# Allegro board H3_CORE_EVM.brd
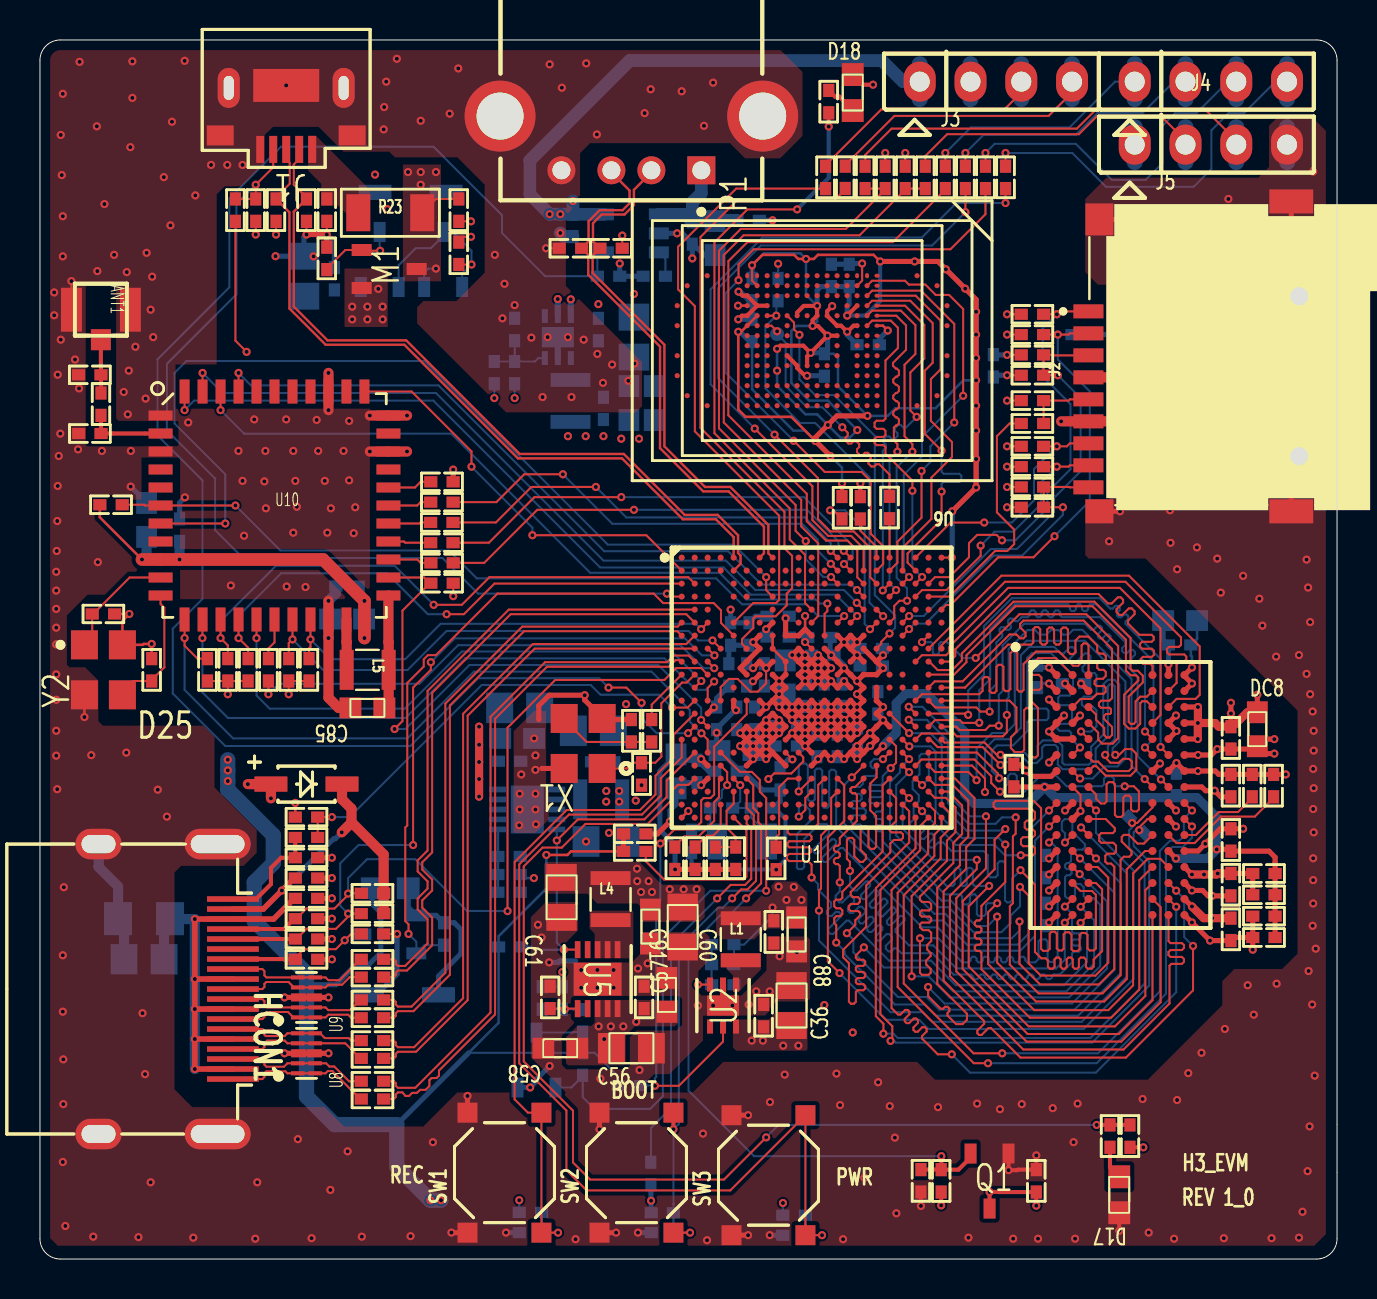
[diagram p0: board, top side]
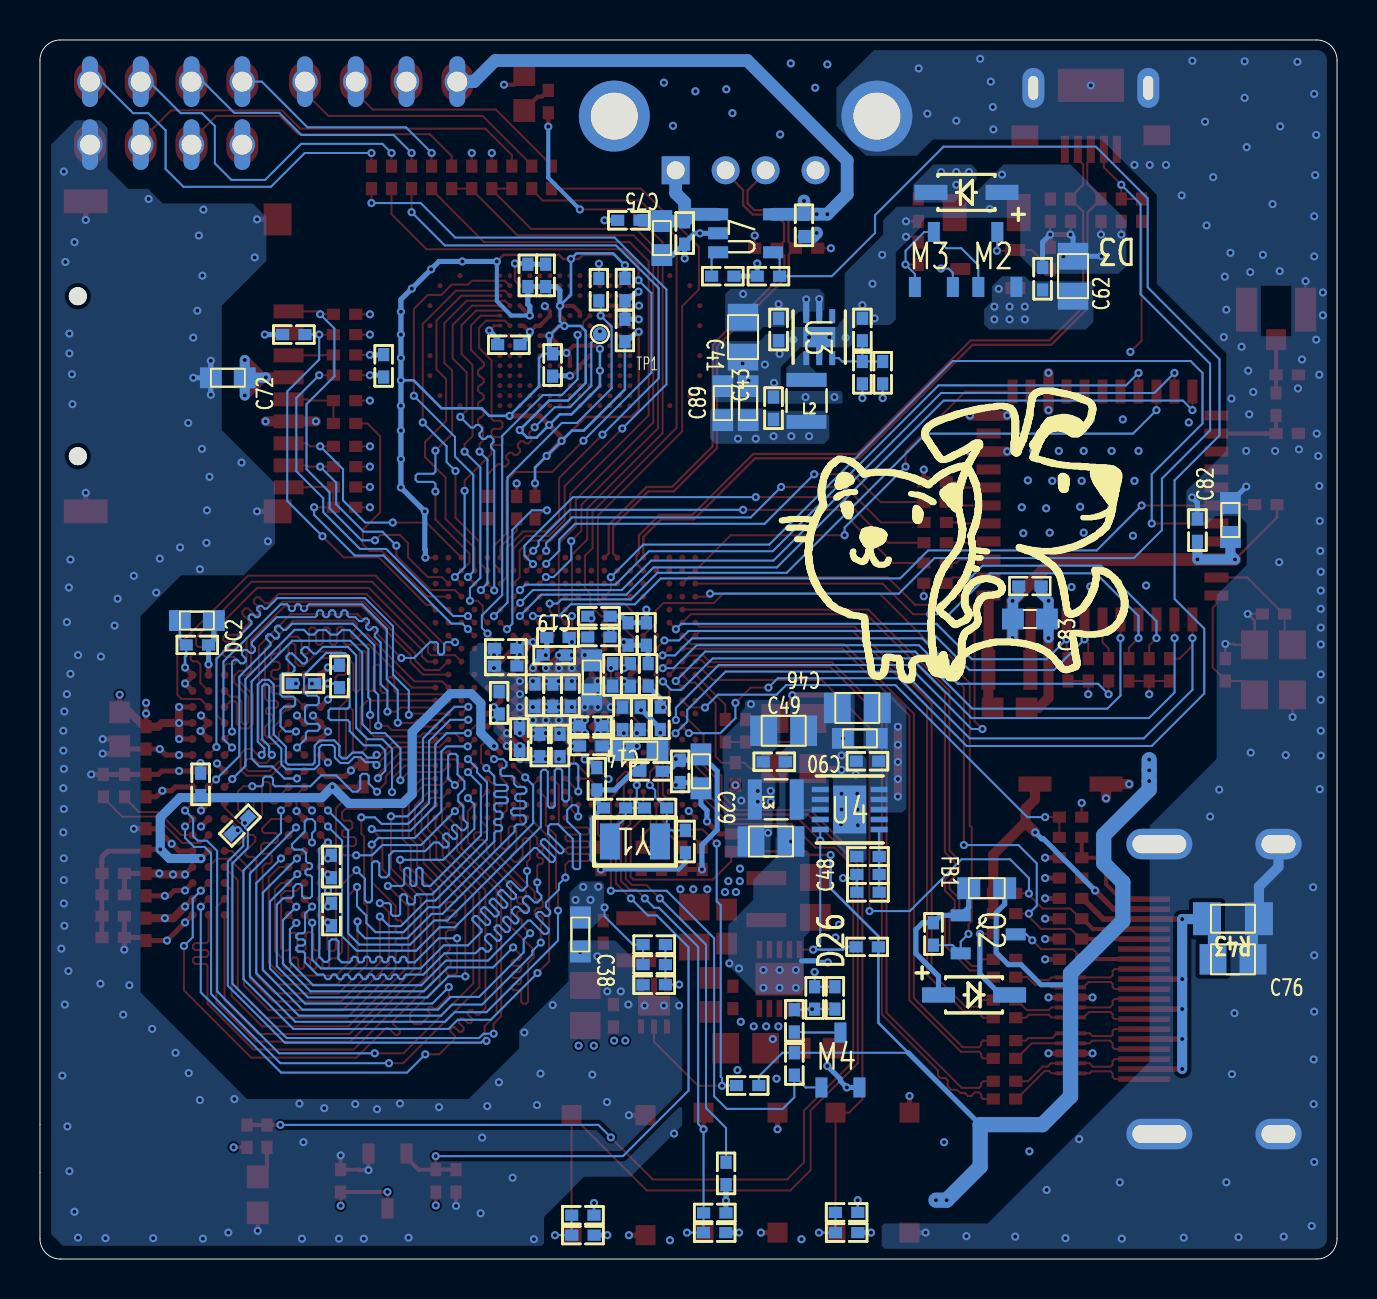
[diagram p1: board, bottom side, seen from below]

Outline 64.9 x 60.96 mm; copper layers: TOP, L2, L3, BOTTOM. Coordinates in mm from the lower left corner of the outline.
Outline path: 0,59.94 0,1.02 arc(0.3,0.3) 1.02,0 63.88,0 arc(64.6,0.3) 64.9,1.02 64.9,59.94 arc(64.6,60.66) 63.88,60.96 1.02,60.96 arc(0.3,60.66) 0,59.94

## Design rules (mm)
constraint set DEFAULT: min track width 0.102
net group ADDR: nets SCKP SRST
net group HTX0: nets HTX0N HTX0P
net group HTX1: nets HTX1N HTX1P
net group HTX2: nets HTX2N HTX2P
net group HTXC: nets HTXCN HTXCP
net group USB0: nets USB-DM0 USB-DP0
net group USB2: nets USB-DM2 USB-DP2
net group DQ0-7: nets SDQ0 SDQ1 SDQ2 SDQ3 SDQ4 SDQ5 SDQ6 SDQ7 SDQM0
net group DQ8-15: nets SDQ8 SDQ9 SDQ10 SDQ11 SDQ12 SDQ13 SDQ14 SDQ15 SDQM1
net group DQS-CK: nets SCKN SDQS0N SDQS0P SDQS1N SDQS1P

## Placement (name value [footprint] x y rotation side)
ANT1  ANT  [ANT_CON]  3.05 47.47 0 top
C1  104  [C0402]  36.93 32.14 0 bottom
C2  104  [C0402]  34.56 31.25 90 bottom
C3  4.7uF  [C0402]  38.98 31.08 0 bottom
C4  104  [C0402]  33.86 27.04 90 bottom
C9  18pF  [C0402]  36.14 22.56 180 bottom
C10  1uF  [C0402]  35.36 29.21 90 bottom
C11  104  [C0402]  36.25 29.21 90 bottom
C12  1uF  [C0402]  41.59 29.65 180 bottom
C13  104  [C0402]  41.59 30.53 180 bottom
C14  10uF  [C0603]  34.85 25.43 0 bottom
C15  1uF  [C0402]  35.75 27.04 270 bottom
C16  1uF  [C0402]  37.34 26.67 180 bottom
C17  104  [C0402]  34.86 27.04 270 bottom
C18  104  [C0402]  37.34 25.65 180 bottom
C19  10uF  [C0603]  37.29 29.08 90 bottom
C20  18pF  [C0402]  32.6 20.88 90 bottom
C21  1uF  [C0402]  38.35 28.19 90 bottom
C22  1uF  [C0402]  39.24 28.19 90 bottom
C23  104  [C0402]  40.13 28.19 90 bottom
C24  104  [C0402]  39.17 30.2 180 bottom
C25  104  [C0402]  49.85 3.91 270 top
C26  104  [C0402]  44.08 3.91 90 top
C27  18pF  [C0402]  30.1 24.26 90 top
C28  104  [C0402]  47.7 44.67 270 bottom
C29  10uF  [C0603]  31.83 24.38 270 bottom
C30  104  [C0402]  32.87 24.38 270 bottom
C32  104  [C0402]  31.76 20.04 90 top
C33  4.7uF  [C0402]  34.81 20.04 90 top
C34  1uF  [C0402]  32.78 20.04 90 top
C35  18pF  [C0402]  29.59 26.42 270 top
C36  22uF/25V  [C0805]  37.6 12.67 90 top
C37  104/16V  [C0402]  36.21 12.17 90 top
C38  10uF  [C0603]  37.86 16.23 270 bottom
C39  104  [C0402]  36.72 16.36 270 top
C40  22pF  [C0402]  34.16 15.72 0 bottom
C41  22uF/16V  [C0805]  29.72 46.1 270 bottom
C42  104/16V  [C0402]  27.94 46.48 270 bottom
C43  10uF  [C0603]  29.46 42.8 90 bottom
C44  104  [C0402]  28.19 42.55 90 bottom
C45  22pF  [C0402]  22.73 44.32 270 bottom
C46  22uF/16V  [C0805]  24 27.56 0 bottom
C47  104/16V  [C0402]  23.5 24.89 0 bottom
C48  22uF  [C0805]  28.32 20.88 180 bottom
C49  22uF  [C0805]  27.69 26.42 180 bottom
C50  104  [C0402]  28.16 24.87 180 bottom
C51  22pF  [C0402]  23.47 19.23 0 bottom
C55  NC  [C0402]  25.12 13.06 270 bottom
C56  22uF  [C0805]  29.59 10.54 0 top
C57  10uF  [C0603]  31.37 13.21 90 top
C58  10uF  [C0603]  26.04 10.54 180 top
C59  104  [C0402]  30.23 13.08 90 top
C60  22uF  [C0805]  32.16 16.6 270 top
C61  22uF  [C0805]  26.1 18.08 270 top
C62  22uF(226)  [C0805]  13.21 49.15 90 bottom
C65  100nF(104)  [C0402]  14.73 49.02 90 bottom
C66  1uF  [C0402]  39.6 49.19 90 bottom
C67  104  [C0402]  40.49 49.19 90 bottom
C68  1uF  [C0402]  39.25 44.71 270 bottom
C69  104  [C0402]  35.63 46.44 90 bottom
C70  1uF  [C0402]  35.63 48.48 270 bottom
C71  104  [C0402]  41.44 45.72 180 bottom
C72  10uF  [C0603]  55.5 44.07 180 bottom
C73  104  [C0402]  26.67 51.69 90 bottom
C74  104  [C0402]  32.64 51.31 90 bottom
C75  10uF  [C0603]  33.78 51.05 90 bottom
C76  NC  [C0805]  5.21 14.99 180 bottom
C77  NC/104  [C0402]  35.47 31.25 270 bottom
C78  10pF  [C0402]  3.05 42.75 90 top
C79  10pF  [C0402]  2.5 41.28 0 top
C80  10pF  [C0402]  2.49 44.22 0 top
C81  100nF(104)  [C0402]  6.99 36.45 90 bottom
C82  10uF(106)  [C0603]  5.33 36.96 90 bottom
C83  10uF(106)  [C0603]  15.37 32 180 bottom
C84  100nF(104)  [C0402]  15.37 33.66 180 bottom
C85  10uF(106)  [C0603]  16.38 27.56 180 top
C86  12pF  [C0402]  3.17 32.26 180 top
C87  12pF  [C0402]  5.59 29.46 270 top
C88  10uF  [C0603]  37.86 16.23 270 top
C89  10uF  [C0603]  30.73 42.8 90 bottom
C90  10uF  [C0603]  23.88 26.04 0 bottom
C91  10uF  [C0603]  30.54 16.62 270 top
D2  ESD5451X  [C0402]  20.95 52.45 270 top
D3  1N4148W  [SOD123]  18.54 53.34 0 bottom
D4  ESD5451X  [C0402]  14.35 52.45 270 top
D5  ESD9B5VL-2/TR  [C0402]  13.34 52.45 270 top
D6  ESD9B5VL-2/TR  [C0402]  11.81 52.45 270 top
D7  ESD5451X  [C0402]  49.66 47.24 180 top
D8  ESD5451X  [C0402]  49.66 46.23 180 top
D9  ESD5451X  [C0402]  49.66 45.21 180 top
D10  ESD5451X  [C0402]  49.66 42.93 180 top
D11  ESD5451X  [C0402]  49.66 40.64 180 top
D12  ESD5451X  [C0402]  49.66 39.62 180 top
D13  ESD5451X  [C0402]  49.66 38.61 180 top
D14  ESD5451X  [C0402]  35.43 51.94 0 bottom
D15  ESD9B5VL-2/TR  [C0402]  28.57 50.55 0 top
D16  ESD9B5VL-2/TR  [C0402]  26.54 50.55 180 top
D17  LED0603  [R0603]  54 3.21 270 top
D18  LED0603  [R0603]  40.67 58.33 90 top
D19  ESD5451X  [C0402]  13.34 18.03 0 top
D20  ESD5451X  [C0402]  13.34 20.07 0 top
D21  ESD5451X  [C0402]  13.34 17.02 0 top
D22  ESD5451X  [C0402]  13.34 16 0 top
D23  ESD5451X  [C0402]  13.34 14.99 0 top
D24  ESD5451X  [C0402]  13.34 19.05 0 top
D25  XBS104S14  [SOD123]  13.34 23.75 0 top
D26  XBS104S14  [SOD123]  18.16 13.21 180 bottom
D27  ESD9B5VL-2/TR  [C0402]  10.79 52.45 270 top
DC1  104  [C0402]  61.24 19.28 180 top
DC2  10uF  [C0603]  57.05 31.93 180 bottom
DC3  1uF  [C0402]  49.91 29.13 90 bottom
DC4  1uF  [C0402]  50.31 17.23 90 bottom
DC5  104  [C0402]  57.02 30.71 180 bottom
DC6  104  [C0402]  50.32 19.63 270 bottom
DC7  104  [C0402]  59.59 26.06 90 top
DC8  10uF  [C0603]  60.91 26.49 90 top
DC9  1uF  [C0402]  51.71 28.78 180 bottom
DC10  1uF  [C0402]  59.59 23.67 270 top
DC11  104  [C0402]  59.59 16.48 90 top
DC12  104  [C0402]  59.59 18.72 90 top
DC13  104  [C0402]  59.59 20.95 270 top
DC14  104  [C0402]  48.73 24.17 270 top
DC15  1uF  [C0402]  39.89 25.68 270 bottom
DC16  1uF  [C0402]  38.87 25.68 270 bottom
DC17  104  [C0402]  40.91 26 270 bottom
DC18  104  [C0402]  41.92 27.81 270 bottom
DC19  104  [C0402]  56.86 23.74 270 bottom
DC20  104  [C0402]  61.24 16.08 0 top
DR1  240-1%  [R0402]  61.72 23.67 270 top
DR2  240-1%  [R0402]  60.66 23.67 270 top
DR3  240-1%  [R0402]  36.84 20.03 270 top
DR4  2K-1%  [R0402]  61.24 18.21 180 top
DR5  2K-1%  [R0402]  61.24 17.14 0 top
DR6  100R  [R0402]  54.89 21.68 135 bottom
DU1  DDR3-FBGA96  [FBGA96C80P9X13]  54.06 23.2 0 top
ESD1  NC/ESD5451X  [C0402]  24.54 1.32 180 bottom
ESD2  NC/ESD5451X  [C0402]  31.14 1.32 180 bottom
ESD3  NC/ESD5451X  [C0402]  37.73 1.19 180 bottom
FB1  0R  [R0603]  17.53 18.54 0 bottom
FB2  NC/0R  [R0402]  29.76 21.26 0 top
FB4  0R  [R0402]  36.93 31.1 180 bottom
HCON1  HDMI_19plug type A  [HDMI-14_5X11_55-23P]  8.89 13.5 270 top
J1  usb micro 5p 5s  [USB-MICRO_SS_5N_3SS_2SP]  12.32 58.46 90 top
J2  MICROSD/TF_SLOT  [TF-CARD-PUSH]  63 45.1 90 top
J3  CON4  [DIP4_2R54MM]  47.83 58.88 0 top
J4  CON4  [DIP4_2R54MM]  58.59 58.88 0 top
J5  CON4  [DIP4_2R54MM]  58.59 55.73 0 top
L1  1uH@1.5A DCR<0.1R  [IND_252012]  35.06 15.99 90 top
L2  1uH@1.5A DCR<0.1R  [IND_252012]  26.54 42.91 270 bottom
L3  2.2uH@2A DCR<0.1R  [IND_252012]  28.08 22.99 0 bottom
L4  2.2uH@4.5A DCR<0.1R  [IND_252012]  28.55 18 90 top
L5  4.7uH  [IND_252012]  16.4 29.46 0 top
M1  AO3401  [SOT23_3]  17.47 49.51 180 top
M2  AO3401  [SOT23_3]  17 49.98 270 bottom
M3  AO3401  [SOT23_3]  20.17 49.98 270 bottom
M4  AO3402  [SOT23_3]  24.85 9.95 270 bottom
P1  USB_A_1  [USB-A_AW_AF01_4N_2SP]  29.59 59.94 180 top
Q1  SGM803  [SOT23_3]  47.51 3.9 90 top
Q2  BSN20  [SOT23_3]  17.45 16.23 0 bottom
R1  0R  [R0402]  37.03 24.02 270 bottom
R2  47K  [R0402]  30.57 4.28 90 bottom
R3  100K  [R0402]  29.76 20.38 0 top
R4  10K  [R0402]  20.12 33.79 180 top
R5  10M-1%  [R0402]  34.1 22.56 0 bottom
R6  10K  [R0402]  45.09 3.91 270 top
R7  220K-1%  [R0402]  33.79 20.04 90 top
R8  0R  [R0402]  30.61 26.42 90 top
R9  0R  [R0402]  34.32 24.39 180 bottom
R10  10K  [R0402]  23.51 15.61 180 bottom
R11  10K  [R0402]  29.49 8.67 180 bottom
R12  15K-1%  [R0402]  34.16 14.72 0 bottom
R13  10K-1%  [R0402]  34.16 13.72 180 bottom
R14  10K-1%  [R0402]  23.75 44.32 270 bottom
R15  2K21-1%  [R0402]  23.75 46.48 270 bottom
R16  100K-1%  [R0402]  23.47 18.34 0 bottom
R17  100K-1%  [R0402]  23.47 20.13 180 bottom
R18  10K-1%  [R0402]  26.14 13.06 90 bottom
R19  12K-1%  [R0402]  25.53 13.08 270 top
R22  10k(103)  [R0402]  9.78 52.45 90 top
R23  3A PTC  [C1206]  17.53 52.32 0 top
R24  10K  [R0402]  36.93 48.48 270 bottom
R25  10k(103)  [R0402]  41.05 37.57 270 top
R26  33R  [R0402]  42.51 37.58 90 top
R27  10k(103)  [R0402]  40.13 37.57 90 top
R28  47K  [R0402]  49.66 44.2 0 top
R29  47K  [R0402]  49.66 37.59 0 top
R30  33R  [R0402]  49.66 41.78 0 top
R31  NC/1M  [R0402]  52.2 46.23 180 bottom
R32  100K  [R0402]  28.45 49.15 180 bottom
R33  6K8-1%  [R0402]  30.73 49.15 0 bottom
R34  10K  [R0402]  24.54 2.33 180 bottom
R35  10K  [R0402]  31.13 2.3 180 bottom
R36  10K  [R0402]  54.54 6.15 270 top
R37  1K  [R0402]  53.54 6.15 90 top
R38  1K  [R0402]  39.46 57.88 270 top
R39  10K  [R0402]  37.74 2.19 180 bottom
R40  4.7K  [R0402]  40.29 54.09 90 top
R41  20K  [R0402]  13.34 21.08 180 top
R42  27K  [R0402]  13.34 22.1 180 top
R43  0R  [R0805]  5.21 17.02 0 bottom
R44  1K8  [R0402]  16.64 17.27 0 top
R45  1K8  [R0402]  16.64 18.29 0 top
R46  27K  [R0402]  20.19 16.26 90 bottom
R47  27K  [R0402]  16.64 16.26 180 top
R48  10K  [R0402]  8.38 29.46 90 top
R49  10K  [R0402]  12.45 29.46 90 top
R50  10K  [R0402]  13.46 29.46 90 top
R51  10K  [R0402]  9.4 29.46 90 top
R52  10K  [R0402]  10.41 29.46 90 top
R53  10K  [R0402]  3.56 37.72 0 top
R54  22R  [R0402]  11.43 29.46 90 top
R55  10k(103)  [R0402]  20.11 38.87 0 top
R56  22R  [R0402]  20.12 34.81 180 top
R57  22R  [R0402]  20.11 35.82 180 top
R58  22R  [R0402]  20.11 36.83 180 top
R59  22R  [R0402]  20.11 37.85 180 top
R62  10K-1%  [R0402]  14.35 50.04 270 top
R63  10K-1%  [R0402]  20.95 50.29 270 top
R64  30K-1%  [R0402]  27.15 11.91 90 bottom
R65  10K  [R0402]  27.15 9.75 90 bottom
R66  2.2R  [R0402]  16.64 8 180 top
R67  2.2R  [R0402]  16.64 8.89 180 top
R68  2.2R  [R0402]  16.64 10.03 180 top
R69  2.2R  [R0402]  16.64 10.92 180 top
R70  2.2R  [R0402]  16.64 12.06 180 top
R71  2.2R  [R0402]  16.64 12.95 180 top
R72  2.2R  [R0402]  16.64 14.1 180 top
R73  2.2R  [R0402]  16.64 14.99 180 top
R74  0R  [R0402]  34.47 29.21 90 bottom
R75  4.7K  [R0402]  39.31 54.09 90 top
R76  4.7K  [R0402]  45.3 54.09 90 top
R77  4.7K  [R0402]  46.3 54.09 90 top
R78  4.7K  [R0402]  47.31 54.09 90 top
R79  4.7K  [R0402]  48.31 54.09 90 top
R80  4.7K  [R0402]  44.3 54.09 90 top
R81  4.7K  [R0402]  41.29 54.09 90 top
R82  4.7K  [R0402]  43.29 54.09 90 top
R83  4.7K  [R0402]  42.29 54.09 90 top
SW1  UBOOT  [SW_PTH_5X5X2P3-4N]  23.24 4.32 90 top
SW2  UBOOT  [SW_PTH_5X5X2P3-4N]  29.84 4.32 90 top
SW3  UBOOT  [SW_PTH_5X5X2P3-4N]  36.45 4.19 90 top
TP1  TP_0.7  [TP_0R70]  36.88 46.25 180 bottom
U1  H3-BGA3XX_11  [BGA347P0_65B14X14]  38.61 28.57 0 top
U2  RT8010GQW  [DRV6_1P6X1]  34.18 12.67 90 top
U3  RT8010GQW  [DRV6_1P6X1]  25.91 46.1 270 bottom
U4  RT8068AZQW  [DRC10_1P65X2P40_TEX]  24.38 22.48 180 bottom
U5  RT8068AZQW  [DRC10_1P65X2P40_TEX]  27.9 14 270 top
U6  EMMC5_0_BGA169  [BGA169_18R00X14R00X1R20]  38.63 45.92 180 top
U7  SY6280  [SOT23_5]  29.59 51.29 180 bottom
U8  ESD3V3U4ULC  [SON10_2R50X1R00X0R50]  13.34 10.29 90 top
U9  ESD3V3U4ULC  [SON10_2R50X1R00X0R50]  13.34 13.08 90 top
U10  AP6212  [MD44_AP6XXX]  11.73 37.68 0 top
X1  24M-20pF-10PPM  [OSCCC250X320X110N]  27.18 25.78 180 top
Y1  32.768K  [FC-135]  35.13 20.88 180 bottom
Y2  16M  [OSCCC250X320X110N]  3.17 29.46 0 top

## Library data of the parts
ANT1 = CRYSTAL-4_2
C1-C4 C9-C30 C32-C35 C66-C71 C77 DC1-DC20 = CAPACITOR_0
C36-C51 C55-C61 C76 C88-C91 = CAPACITOR_1
C62 C65 C78-C87 = CAP NP
C72-C75 = CAPACITOR
D2 D4-D16 D19-D24 D27 ESD1-ESD3 = 1_1.5KE100A
D3 = DIODE_0
D17 D18 = LED55B/TO_0
D25 = DIODE_SCHOTTKY_3
D26 = DIODE_SCHOTTKY_4
DR1-DR3 DR6 R1-R5 R7-R19 R22-R33 R40 R41 R48-R53 R55 R62-R83 = R
DR4 DR5 = ?_0
DU1 = DDR3_1: Tolerance: RichardLC
FB1 FB2 FB4 L1-L4 = INDUCTOR_1
HCON1 = HDMI19_PLUG
J1 = usb micro 5p 5s
J2 = SDMMC SLOT_0: User Part Number: PRAT NUMBER; Tolerance: TOLERANCE
J3-J5 = CON4
L5 = INDUCTOR
M1-M3 = AO3401_0
M4 = AO3402_0
P1 = USB_A_0
Q1 = NPN
Q2 = NMOS_0
R6 R34-R39 = R1 0805
R42-R47 R54 R56-R59 = RESISTOR
SW1-SW3 = SW_PUSH
TP1 = TP
U1 = H3-BGA3XX_12
U2 U3 = RT8010GQW: User Part Number: PN; Tolerance: TOL
U4 U5 = RT8068AZQW
U6 = EMMC5_0_BGA169
U7 = RT9266PE_2
U8 U9 = rRClamp0524P
U10 = MODULE_AP6XXX_1
X1 = CRYSTAL-4_0
Y1 = CRYSTAL_1
Y2 = CRYSTAL_4pin

## Footprints (pads in the part's own frame, mm; a bottom-side part is the same pattern mirrored in y, then rotated)
ANT_CON
  rect 1.05x2.2 smd: 1(-1.475,0) 3(1.475,0)
  rect 1x1.05 smd: 2(0,-1.5)
BGA169_18R00X14R00X1R20
  round 0.254 smd: A4(-6.75,-1.75) A6(-6.75,-0.75) A9(-6.75,0.75) A11(-6.75,1.75) AA2(3.25,-2.75) AA3(3.25,-2.25) AA4(3.25,-1.75) AA5(3.25,-1.25) AA6(3.25,-0.75) AA7(3.25,-0.25) AA8(3.25,0.25) AA9(3.25,0.75) AA10(3.25,1.25) AA11(3.25,1.75) AA12(3.25,2.25) AA13(3.25,2.75) AA14(3.25,3.25) AE1(5.25,-3.25) AE14(5.25,3.25) AG2(6.25,-2.75) AG13(6.25,2.75) AH4(6.75,-1.75) AH6(6.75,-0.75) AH9(6.75,0.75) AH11(6.75,1.75) B2(-6.25,-2.75) B13(-6.25,2.75) D1(-5.25,-3.25) D14(-5.25,3.25) H8(-3.25,0.25) H9(-3.25,0.75) H10(-3.25,1.25) H11(-3.25,1.75) H12(-3.25,2.25) H13(-3.25,2.75) H14(-3.25,3.25) J2(-2.75,-2.75) J3(-2.75,-2.25) J4(-2.75,-1.75) J5(-2.75,-1.25) J6(-2.75,-0.75) J7(-2.75,-0.25) J8(-2.75,0.25) J9(-2.75,0.75) J10(-2.75,1.25) J11(-2.75,1.75) J12(-2.75,2.25) J13(-2.75,2.75) J14(-2.75,3.25) K2(-2.25,-2.75) K3(-2.25,-2.25) K4(-2.25,-1.75) K5(-2.25,-1.25) K6(-2.25,-0.75) K7(-2.25,-0.25) K8(-2.25,0.25) K9(-2.25,0.75) K10(-2.25,1.25) K11(-2.25,1.75) K12(-2.25,2.25) K13(-2.25,2.75) K14(-2.25,3.25) L1(-1.75,-3.25) L2(-1.75,-2.75) L3(-1.75,-2.25) L4(-1.75,-1.75) L12(-1.75,2.25) L13(-1.75,2.75) L14(-1.75,3.25) M1(-1.25,-3.25) M2(-1.25,-2.75) M3(-1.25,-2.25) M5(-1.25,-1.25) M6(-1.25,-0.75) M7(-1.25,-0.25) M8(-1.25,0.25) M9(-1.25,0.75) M10(-1.25,1.25) M12(-1.25,2.25) M13(-1.25,2.75) M14(-1.25,3.25) N1(-0.75,-3.25) N2(-0.75,-2.75) N3(-0.75,-2.25) N5(-0.75,-1.25) N10(-0.75,1.25) N12(-0.75,2.25) N13(-0.75,2.75) N14(-0.75,3.25) P1(-0.25,-3.25) P2(-0.25,-2.75) P3(-0.25,-2.25) P5(-0.25,-1.25) P10(-0.25,1.25) P12(-0.25,2.25) P13(-0.25,2.75) P14(-0.25,3.25) R1(0.25,-3.25) R2(0.25,-2.75) R3(0.25,-2.25) R5(0.25,-1.25) R10(0.25,1.25) R12(0.25,2.25) R13(0.25,2.75) R14(0.25,3.25) T1(0.75,-3.25) T2(0.75,-2.75) T3(0.75,-2.25) T5(0.75,-1.25) T10(0.75,1.25) T12(0.75,2.25) T13(0.75,2.75) T14(0.75,3.25) U1(1.25,-3.25) U2(1.25,-2.75) U3(1.25,-2.25) U5(1.25,-1.25) U6(1.25,-0.75) U7(1.25,-0.25) U8(1.25,0.25) U9(1.25,0.75) U10(1.25,1.25) U12(1.25,2.25) U13(1.25,2.75) U14(1.25,3.25) V1(1.75,-3.25) V2(1.75,-2.75) V3(1.75,-2.25) V12(1.75,2.25) V13(1.75,2.75) V14(1.75,3.25) W1(2.25,-3.25) W2(2.25,-2.75) W3(2.25,-2.25) W4(2.25,-1.75) W5(2.25,-1.25) W6(2.25,-0.75) W7(2.25,-0.25) W8(2.25,0.25) W9(2.25,0.75) W10(2.25,1.25) W11(2.25,1.75) W12(2.25,2.25) W13(2.25,2.75) W14(2.25,3.25) Y2(2.75,-2.75) Y3(2.75,-2.25) Y4(2.75,-1.75) Y5(2.75,-1.25) Y6(2.75,-0.75) Y7(2.75,-0.25) Y8(2.75,0.25) Y9(2.75,0.75) Y10(2.75,1.25) Y11(2.75,1.75) Y12(2.75,2.25) Y13(2.75,2.75) Y14(2.75,3.25)
  oval 0.191x0.254 smd: AA1(3.25,-3.25) J1(-2.75,-3.25) K1(-2.25,-3.25) Y1(2.75,-3.25)
  oval 0.254x0.191 smd: H1(-3.25,-3.25) H2(-3.25,-2.75) H3(-3.25,-2.25) H4(-3.25,-1.75) H5(-3.25,-1.25) H6(-3.25,-0.75) H7(-3.25,-0.25)
BGA347P0_65B14X14
  round 0.3 smd: A1(-6.5,6.5) A2(-5.85,6.5) A3(-5.2,6.5) A4(-4.55,6.5) A5(-3.9,6.5) A7(-2.6,6.5) A8(-1.95,6.5) A10(-0.65,6.5) A11(0,6.5) A13(1.3,6.5) A14(1.95,6.5) A16(3.25,6.5) A17(3.9,6.5) A19(5.2,6.5) A20(5.85,6.5) A21(6.5,6.5) AA1(-6.5,-6.5) AA2(-5.85,-6.5) AA3(-5.2,-6.5) AA5(-3.9,-6.5) AA6(-3.25,-6.5) AA8(-1.95,-6.5) AA9(-1.3,-6.5) AA11(0,-6.5) AA12(0.65,-6.5) AA14(1.95,-6.5) AA15(2.6,-6.5) AA17(3.9,-6.5) AA18(4.55,-6.5) AA19(5.2,-6.5) AA20(5.85,-6.5) AA21(6.5,-6.5) B1(-6.5,5.85) B2(-5.85,5.85) B3(-5.2,5.85) B4(-4.55,5.85) B5(-3.9,5.85) B6(-3.25,5.85) B7(-2.6,5.85) B8(-1.95,5.85) B9(-1.3,5.85) B10(-0.65,5.85) B11(0,5.85) B12(0.65,5.85) B13(1.3,5.85) B14(1.95,5.85) B15(2.6,5.85) B16(3.25,5.85) B17(3.9,5.85) B18(4.55,5.85) B19(5.2,5.85) B20(5.85,5.85) B21(6.5,5.85) C1(-6.5,5.2) C2(-5.85,5.2) C3(-5.2,5.2) C5(-3.9,5.2) C6(-3.25,5.2) C7(-2.6,5.2) C8(-1.95,5.2) C9(-1.3,5.2) C10(-0.65,5.2) C11(0,5.2) C12(0.65,5.2) C13(1.3,5.2) C14(1.95,5.2) C15(2.6,5.2) C16(3.25,5.2) C17(3.9,5.2) C18(4.55,5.2) C19(5.2,5.2) C20(5.85,5.2) C21(6.5,5.2) D1(-6.5,4.55) D2(-5.85,4.55) D3(-5.2,4.55) D5(-3.9,4.55) D6(-3.25,4.55) D8(-1.95,4.55) D10(-0.65,4.55) D11(0,4.55) D13(1.3,4.55) D15(2.6,4.55) D17(3.9,4.55) D19(5.2,4.55) D20(5.85,4.55) E2(-5.85,3.9) E3(-5.2,3.9) E8(-1.95,3.9) E10(-0.65,3.9) E11(0,3.9) E13(1.3,3.9) E14(1.95,3.9) E15(2.6,3.9) E16(3.25,3.9) E18(4.55,3.9) E19(5.2,3.9) E20(5.85,3.9) E21(6.5,3.9) F1(-6.5,3.25) F2(-5.85,3.25) F3(-5.2,3.25) F5(-3.9,3.25) F6(-3.25,3.25) F7(-2.6,3.25) F8(-1.95,3.25) F10(-0.65,3.25) F11(0,3.25) F13(1.3,3.25) F14(1.95,3.25) F16(3.25,3.25) F17(3.9,3.25) F18(4.55,3.25) F19(5.2,3.25) F20(5.85,3.25) F21(6.5,3.25) G1(-6.5,2.6) G2(-5.85,2.6) G4(-4.55,2.6) G5(-3.9,2.6) G7(-2.6,2.6) G8(-1.95,2.6) G9(-1.3,2.6) G10(-0.65,2.6) G11(0,2.6) G12(0.65,2.6) G13(1.3,2.6) G14(1.95,2.6) G15(2.6,2.6) G18(4.55,2.6) G20(5.85,2.6) H2(-5.85,1.95) H3(-5.2,1.95) H4(-4.55,1.95) H6(-3.25,1.95) H7(-2.6,1.95) H8(-1.95,1.95) H10(-0.65,1.95) H11(0,1.95) H12(0.65,1.95) H13(1.3,1.95) H14(1.95,1.95) H15(2.6,1.95) H16(3.25,1.95) H17(3.9,1.95) H18(4.55,1.95) H19(5.2,1.95) H20(5.85,1.95) H21(6.5,1.95) J1(-6.5,1.3) J2(-5.85,1.3) J3(-5.2,1.3) J6(-3.25,1.3) J7(-2.6,1.3) J8(-1.95,1.3) J9(-1.3,1.3) J10(-0.65,1.3) J11(0,1.3) J12(0.65,1.3) J13(1.3,1.3) J14(1.95,1.3) J15(2.6,1.3) J16(3.25,1.3) J19(5.2,1.3) J20(5.85,1.3) J21(6.5,1.3) K1(-6.5,0.65) K2(-5.85,0.65) K3(-5.2,0.65) K4(-4.55,0.65) K6(-3.25,0.65) K7(-2.6,0.65) K8(-1.95,0.65) K9(-1.3,0.65) K10(-0.65,0.65) K11(0,0.65) K12(0.65,0.65) K13(1.3,0.65) K14(1.95,0.65) K15(2.6,0.65) K16(3.25,0.65) K17(3.9,0.65) K18(4.55,0.65) K20(5.85,0.65) L2(-5.85,0) L5(-3.9,0) L8(-1.95,0) L9(-1.3,0) L10(-0.65,0) L11(0,0) L12(0.65,0) L13(1.3,0) L14(1.95,0) L15(2.6,0) L16(3.25,0) L17(3.9,0) L18(4.55,0) L19(5.2,0) L20(5.85,0) L21(6.5,0) M1(-6.5,-0.65) M2(-5.85,-0.65) M3(-5.2,-0.65) M4(-4.55,-0.65) M5(-3.9,-0.65) M6(-3.25,-0.65) M7(-2.6,-0.65) M8(-1.95,-0.65) M9(-1.3,-0.65) M10(-0.65,-0.65) M11(0,-0.65) M12(0.65,-0.65) M13(1.3,-0.65) M14(1.95,-0.65) M15(2.6,-0.65) M16(3.25,-0.65) M19(5.2,-0.65) M20(5.85,-0.65) M21(6.5,-0.65) N1(-6.5,-1.3) N2(-5.85,-1.3) N3(-5.2,-1.3) N7(-2.6,-1.3) N8(-1.95,-1.3) N9(-1.3,-1.3) N10(-0.65,-1.3) N11(0,-1.3) N12(0.65,-1.3) N13(1.3,-1.3) N14(1.95,-1.3) N15(2.6,-1.3) N16(3.25,-1.3) N17(3.9,-1.3) N19(5.2,-1.3) N20(5.85,-1.3) P2(-5.85,-1.95) P3(-5.2,-1.95) P6(-3.25,-1.95) P7(-2.6,-1.95) P8(-1.95,-1.95) P9(-1.3,-1.95) P10(-0.65,-1.95) P11(0,-1.95) P12(0.65,-1.95) P13(1.3,-1.95) P14(1.95,-1.95) P15(2.6,-1.95) P16(3.25,-1.95) P17(3.9,-1.95) P19(5.2,-1.95) P20(5.85,-1.95) P21(6.5,-1.95) R1(-6.5,-2.6) R2(-5.85,-2.6) R6(-3.25,-2.6) R7(-2.6,-2.6) R8(-1.95,-2.6) R9(-1.3,-2.6) R10(-0.65,-2.6) R11(0,-2.6) R12(0.65,-2.6) R13(1.3,-2.6) R14(1.95,-2.6) R16(3.25,-2.6) R17(3.9,-2.6) R18(4.55,-2.6) R19(5.2,-2.6) R20(5.85,-2.6) R21(6.5,-2.6) T2(-5.85,-3.25) T3(-5.2,-3.25) T4(-4.55,-3.25) T5(-3.9,-3.25) T6(-3.25,-3.25) T7(-2.6,-3.25) T8(-1.95,-3.25) T9(-1.3,-3.25) T10(-0.65,-3.25) T11(0,-3.25) T12(0.65,-3.25) T13(1.3,-3.25) T14(1.95,-3.25) T15(2.6,-3.25) T16(3.25,-3.25) T17(3.9,-3.25) T18(4.55,-3.25) T20(5.85,-3.25) U2(-5.85,-3.9) U3(-5.2,-3.9) U4(-4.55,-3.9) U6(-3.25,-3.9) U9(-1.3,-3.9) U11(0,-3.9) U15(2.6,-3.9) U16(3.25,-3.9) U18(4.55,-3.9) U19(5.2,-3.9) U20(5.85,-3.9) U21(6.5,-3.9) V1(-6.5,-4.55) V2(-5.85,-4.55) V3(-5.2,-4.55) V4(-4.55,-4.55) V5(-3.9,-4.55) V6(-3.25,-4.55) V10(-0.65,-4.55) V11(0,-4.55) V12(0.65,-4.55) V13(1.3,-4.55) V15(2.6,-4.55) V17(3.9,-4.55) V19(5.2,-4.55) V20(5.85,-4.55) V21(6.5,-4.55) W1(-6.5,-5.2) W2(-5.85,-5.2) W3(-5.2,-5.2) W5(-3.9,-5.2) W6(-3.25,-5.2) W9(-1.3,-5.2) W11(0,-5.2) W12(0.65,-5.2) W13(1.3,-5.2) W15(2.6,-5.2) W17(3.9,-5.2) W18(4.55,-5.2) W20(5.85,-5.2) W21(6.5,-5.2) Y1(-6.5,-5.85) Y2(-5.85,-5.85) Y3(-5.2,-5.85) Y4(-4.55,-5.85) Y7(-2.6,-5.85) Y8(-1.95,-5.85) Y9(-1.3,-5.85) Y10(-0.65,-5.85) Y11(0,-5.85) Y12(0.65,-5.85) Y13(1.3,-5.85) Y14(1.95,-5.85) Y15(2.6,-5.85) Y16(3.25,-5.85) Y17(3.9,-5.85) Y18(4.55,-5.85) Y19(5.2,-5.85) Y20(5.85,-5.85) Y21(6.5,-5.85)
C0402
  rect 0.66x0.56 smd: 1(-0.56,0) 2(0.56,0)
C0603
  rect 1.092x1.041 smd: 1(-0.85,0) 2(0.85,0)
C0805
  rect 1.346x1.524 smd: 1(-1,0) 2(1,0)
C1206
  rect 1.2x1.85 smd: 1(1.6,0) 2(-1.6,0)
DIP4_2R54MM
  oval 1.6x2 hole 1: 1(-3.81,0) 2(-1.27,0) 3(1.27,0) 4(3.81,0)
DRC10_1P65X2P40_TEX
  rect 0.85x0.28 smd: 1(-1.475,1) 2(-1.475,0.5) 3(-1.475,0) 4(-1.475,-0.5) 5(-1.475,-1) 6(1.475,-1) 7(1.475,-0.5) 8(1.475,0) 9(1.475,0.5) 10(1.475,1)
  rect 1.65x2.4 smd: 11(0,0)
DRV6_1P6X1
  rect 0.7x0.3 smd: 1(-1.05,0.65) 2(-1.05,0) 3(-1.05,-0.65) 4(1.05,-0.65) 5(1.05,0) 6(1.05,0.65)
  rect 1.016x1.6 smd: 7(0,0)
FBGA96C80P9X13
  round 0.4 smd: A1(-3.2,6) A2(-2.4,6) A3(-1.6,6) A7(1.6,6) A8(2.4,6) A9(3.2,6) B1(-3.2,5.2) B2(-2.4,5.2) B3(-1.6,5.2) B7(1.6,5.2) B8(2.4,5.2) B9(3.2,5.2) C1(-3.2,4.4) C2(-2.4,4.4) C3(-1.6,4.4) C7(1.6,4.4) C8(2.4,4.4) C9(3.2,4.4) D1(-3.2,3.6) D2(-2.4,3.6) D3(-1.6,3.6) D7(1.6,3.6) D8(2.4,3.6) D9(3.2,3.6) E1(-3.2,2.8) E2(-2.4,2.8) E3(-1.6,2.8) E7(1.6,2.8) E8(2.4,2.8) E9(3.2,2.8) F1(-3.2,2) F2(-2.4,2) F3(-1.6,2) F7(1.6,2) F8(2.4,2) F9(3.2,2) G1(-3.2,1.2) G2(-2.4,1.2) G3(-1.6,1.2) G7(1.6,1.2) G8(2.4,1.2) G9(3.2,1.2) H1(-3.2,0.4) H2(-2.4,0.4) H3(-1.6,0.4) H7(1.6,0.4) H8(2.4,0.4) H9(3.2,0.4) J1(-3.2,-0.4) J2(-2.4,-0.4) J3(-1.6,-0.4) J7(1.6,-0.4) J8(2.4,-0.4) J9(3.2,-0.4) K1(-3.2,-1.2) K2(-2.4,-1.2) K3(-1.6,-1.2) K7(1.6,-1.2) K8(2.4,-1.2) K9(3.2,-1.2) L1(-3.2,-2) L2(-2.4,-2) L3(-1.6,-2) L7(1.6,-2) L8(2.4,-2) L9(3.2,-2) M1(-3.2,-2.8) M2(-2.4,-2.8) M3(-1.6,-2.8) M7(1.6,-2.8) M8(2.4,-2.8) M9(3.2,-2.8) N1(-3.2,-3.6) N2(-2.4,-3.6) N3(-1.6,-3.6) N7(1.6,-3.6) N8(2.4,-3.6) N9(3.2,-3.6) P1(-3.2,-4.4) P2(-2.4,-4.4) P3(-1.6,-4.4) P7(1.6,-4.4) P8(2.4,-4.4) P9(3.2,-4.4) R1(-3.2,-5.2) R2(-2.4,-5.2) R3(-1.6,-5.2) R7(1.6,-5.2) R8(2.4,-5.2) R9(3.2,-5.2) T1(-3.2,-6) T2(-2.4,-6) T3(-1.6,-6) T7(1.6,-6) T8(2.4,-6) T9(3.2,-6)
FC-135
  rect 1x1.8 smd: 1(1.25,0) 2(-1.25,0)
HDMI-14_5X11_55-23P
  rect 0.279x2.591 smd: 1(4.5,0.765) 2(4,0.765) 3(3.5,0.765) 4(3,0.765) 5(2.5,0.765) 6(2,0.765) 7(1.5,0.765) 8(1,0.765) 9(0.5,0.765) 10(0,0.765) 11(-0.5,0.765) 12(-1,0.765) 13(-1.5,0.765) 14(-2,0.765) 15(-2.5,0.765) 16(-3,0.765) 17(-3.5,0.765) 18(-4,0.765) 19(-4.5,0.765)
  oval 1.524x3.302 hole 0.914x2.692: 20(-7.25,0) 21(7.25,0)
  oval 1.524x2.311 hole 0.914x1.702: 22(-7.25,-5.96) 23(7.25,-5.96)
IND_252012
  rect 0.7x2 smd: 1(-1.05,0) 2(1.05,0)
MD44_AP6XXX
  rect 1.2x0.5 smd: 1(-5.7,4.5) 2(-5.7,3.6) 3(-5.7,2.7) 4(-5.7,1.8) 5(-5.7,0.9) 6(-5.7,0) 7(-5.7,-0.9) 8(-5.7,-1.8) 9(-5.7,-2.7) 10(-5.7,-3.6) 11(-5.7,-4.5) 23(5.7,-4.5) 24(5.7,-3.6) 25(5.7,-2.7) 26(5.7,-1.8) 27(5.7,-0.9) 28(5.7,0) 29(5.7,0.9) 30(5.7,1.8) 31(5.7,2.7) 32(5.7,3.6) 33(5.7,4.5)
  rect 0.5x1.2 smd: 12(-4.5,-5.7) 13(-3.6,-5.7) 14(-2.7,-5.7) 15(-1.8,-5.7) 16(-0.9,-5.7) 17(0,-5.7) 18(0.9,-5.7) 19(1.8,-5.7) 20(2.7,-5.7) 21(3.6,-5.7) 22(4.5,-5.7) 34(4.5,5.7) 35(3.6,5.7) 36(2.7,5.7) 37(1.8,5.7) 38(0.9,5.7) 39(0,5.7) 40(-0.9,5.7) 41(-1.8,5.7) 42(-2.7,5.7) 43(-3.6,5.7) 44(-4.5,5.7)
OSCCC250X320X110N
  rect 1.35x1.45 smd: 1(-0.95,1.25) 2(-0.95,-1.25) 3(0.95,-1.25) 4(0.95,1.25)
R0402
  rect 0.66x0.56 smd: 1(-0.56,0) 2(0.56,0)
R0603
  rect 1.143x1.092 smd: 1(-0.9,0) 2(0.9,0)
R0805
  rect 1.4x1.65 smd: 1(-1.3,0) 2(1.3,0)
SOD123
  rect 1.651x0.762 smd: 1(-1.778,0) 2(1.778,0)
SON10_2R50X1R00X0R50
  rect 0.2x0.68 smd: 1(-1,-0.437) 2(-0.5,-0.437) 4(0.5,-0.437) 5(1,-0.437) 6(1,0.437) 7(0.5,0.437) 9(-0.5,0.437) 10(-1,0.437)
  rect 0.4x0.75 smd: 3(0,-0.395) 8(0,0.395)
SOT23_3
  rect 1x0.6 smd: 1(1.375,-0.95) 2(1.375,0.95) 3(-1.375,0)
SOT23_5
  rect 1x0.6 smd: 1(-1.375,0.95) 2(-1.375,0) 3(-1.375,-0.95) 4(1.375,-0.95) 5(1.375,0.95)
SW_PTH_5X5X2P3-4N
  rect 1x1 smd: 1(-3,1.85) 2(3,1.85) 3(3,-1.85) 4(-3,-1.85)
TF-CARD-PUSH
  round 0.9 hole 0.9 unplated: (-4.95,0) (3.05,0)
  rect 0.7x1.5 smd: 1(2.291,10.547) 2(1.191,10.547) 3(0.091,10.547) 4(-1.009,10.547) 5(-2.109,10.547) 6(-3.209,10.547) 7(-4.309,10.547) 8(-5.409,10.547) 9(-6.509,10.547)
  rect 1.2x1.4 smd: 10(-7.709,9.997)
  rect 1.2x2.2 smd: 11(-7.709,0.397) 13(7.791,0.397)
  rect 1.6x1.4 smd: 12(6.891,9.997)
TP_0R70
  round 0.7 smd: 1(0,0)
USB-A_AW_AF01_4N_2SP
  rect 1.4x1.4 hole 0.9: 1(-3.5,5.5)
  round 1.4 hole 0.9: 2(-1,5.5) 3(1,5.5) 4(3.5,5.5)
  round 3.55 hole 2.35: S1(-6.57,2.79) S2(6.57,2.79)
USB-MICRO_SS_5N_3SS_2SP
  rect 1.35x0.4 smd: 1(-2.975,-1.3) 2(-2.975,-0.65) 3(-2.975,0) 4(-2.975,0.65) 5(-2.975,1.3)
  rect 1.65x3.3 smd: S1(0.225,0)
  oval 2x1.1 hole 1.2x0.5: S2(0.1,-2.875) S4(0.1,2.875)
  rect 1x1.35 smd: S3(-2.275,-3.3) S5(-2.275,3.3)

## Nets
AGND: C29.1 C30.1 C32.1 C33.1 C34.1 R7.1 R9.2 U1.U3
AVCC: C29.2 C30.2 FB2.2 U1.V3
GND: ANT1.1(GND2) ANT1.3 C1.1 C2.2 C3.2 C4.1 C9.1 C10.1 C11.1 C12.1 C13.1 C14.1 C15.1 C16.1 C17.1 C18.1 C19.1 C20.1 C21.1 C22.1 C23.1 C24.1 C25.1 C26.1 C27.1 C28.1 C35.1 C36.2 C37.2 C38.2 C39.2 C41.2 C42.2 C43.2 C44.2 C46.2 C47.2 C48.2 C49.2 C50.2 C56.2 C57.2 C58.2 C59.2 C60.2 C61.2 C62.2 C65.2 C66.1 C67.1 C68.1 C69.1 C70.1 C71.1 C72.1 C73.1 C74.1 C75.1 C76.2 C77.1 C79.1 C80.1 C81.2 C82.2 C83.2 C84.2 C85.2 C86.1 C87.1 C88.2 C89.2 C90.2 C91.2 D2.2(CATHODE) D3.1 D4.2(CATHODE) D5.2(CATHODE) D6.2(CATHODE) D7.2(CATHODE) D8.2(CATHODE) D9.2(CATHODE) D10.2(CATHODE) D11.2(CATHODE) D12.2(CATHODE) D13.2(CATHODE) D14.2(CATHODE) D15.2(CATHODE) D16.2(CATHODE) D17.2(CATHODE) D18.2(CATHODE) D19.2(CATHODE) D20.2(CATHODE) D21.2(CATHODE) D22.2(CATHODE) D23.2(CATHODE) D24.2(CATHODE) D27.2(CATHODE) DC2.1 DC3.1 DC4.1 DC5.1 DC6.1 DC7.1 DC8.1 DC9.1 DC10.1 DC11.1 DC12.1 DC13.1 DC14.1 DC15.1 DC16.1 DC17.1 DC18.1 DC19.1 DC20.1 DR1.1 DR2.1 DR3.2 DR5.1 DU1.A9 DU1.B1 DU1.B3 DU1.B9 DU1.D1 DU1.D8 DU1.E1 DU1.E2 DU1.E8 DU1.F9 DU1.G1 DU1.G8 DU1.G9 DU1.J2 DU1.J8 DU1.M1 DU1.M9 DU1.P1 DU1.P9 DU1.T1 DU1.T9 ESD1.2(CATHODE) ESD2.2(CATHODE) ESD3.2(CATHODE) HCON1.20 HCON1.21 HCON1.22 HCON1.23(SHIELD4) J1.5 J1.S1 J1.S2 J1.S3 J1.S4 J1.S5 J2.6(VSS2) J2.10 J2.11 J2.12 J2.13 J3.2 J5.4 M4.2(S) P1.4 P1.S1 P1.S2 Q1.1 R1.2 R9.1 R13.1 R15.1 R17.1 R19.1 R27.2 R31.1 R32.1 R33.1 R42.2 R43.1 R55.2 R62.1 R63.1 SW1.1 SW1.2 SW2.1 SW2.2 SW3.1 SW3.2 U1.A21 U1.AA1 U1.G8 U1.H8 U1.H12 U1.H15 U1.J9 U1.J13 U1.J16 U1.K7 U1.K8 U1.K9 U1.K13 U1.K14(GND9) U1.K15 U1.K16 U1.L8 U1.L9 U1.L15 U1.M5 U1.M7 U1.M8 U1.M9 U1.M10 U1.M11 U1.M12 U1.M13 U1.M14 U1.M15 U1.N7 U1.N9 U1.N10 U1.N11 U1.N12 U1.N13 U1.N14 U1.N15 U1.P10 U1.P11 U1.P12 U1.P13 U1.P14 U1.P15 U1.R9 U1.R10 U1.R11 U1.R12 U1.R13 U1.R14 U1.T11 U2.5 U2.7 U3.5 U3.7 U4.11 U5.11 U6.AA4 U6.AA6 U6.H6 U6.K4 U6.M7 U6.P5 U6.R10 U6.T5 U6.U8 U6.Y2 U6.Y5 U7.2 U8.3 U8.8 U9.3 U9.8 U10.1 U10.3 U10.20 U10.31 U10.33 U10.36 X1.2 X1.4 Y2.2 Y2.4
VCC-1V2: C19.2 C21.2 C22.2 C23.2 C24.2 C48.1 C49.1 C50.1 C51.2 FB4.1 L3.2 R16.2 U1.H10 U1.J10 U1.J11 U1.J12 U1.K10 U1.K11 U1.K12 U1.L10 U1.L11 U1.L12 U1.L13 U1.L14
VCC-3V3: C1.2 C2.1 C12.2 C13.2 C25.2 C28.2 C43.1 C44.1 C45.2 C68.2 C69.2 C70.2 C71.2 C72.2 C77.2 C81.1 C82.1 C83.1 C84.1 C89.1 FB1.1 FB2.1 J2.4 J5.1 L2.2 Q1.3 R2.1 R3.1 R4.1 R6.2 R10.2 R11.2 R14.2 R22.1 R24.1 R25.1 R28.1 R29.1 R34.2 R35.2 R36.2 R39.2 R48.1 R49.1 R50.1 R51.1 R52.1 R53.1 R65.2 R74.2 R82.2 R83.2 U1.G7 U1.G9 U1.G10 U1.G11 U1.G13 U1.G14 U1.G15 U1.H7 U1.H13 U1.H14 U1.J6 U1.J14 U1.J15 U1.K6 U6.AA3 U6.AA5 U6.K6 U6.M6 U6.N5 U6.T10 U6.U9 U6.W4 U6.Y4 U10.9 U10.22
VCC-DRAM: C38.1 C39.1 C40.2 C88.1 DC1.2 DC2.2 DC3.2 DC4.2 DC5.2 DC6.2 DC7.2 DC8.2 DC9.2 DC10.2 DC11.2 DC12.2 DC15.2 DC16.2 DC17.2 DC18.2 DR4.2 DU1.A1 DU1.A8 DU1.B2 DU1.C1 DU1.C9 DU1.D2 DU1.D9 DU1.E9 DU1.F1 DU1.G7 DU1.H2 DU1.H9 DU1.K2 DU1.K8 DU1.N1 DU1.N9 DU1.R1 DU1.R9 L1.2 R12.2 U1.L16 U1.M16 U1.N16 U1.P16 U1.P17 U1.R16 U1.T12 U1.T13 U1.T14 U1.T15 U1.U11
VDD1V1-EPHY: FB4.2 U1.F8
VDD-CPUFB: C55.1 R18.2 U1.T10
VDD-CPUS: C10.2 C11.2 U1.J7 U1.J8 U1.M4
VDD-CPUX: C14.2 C15.2 C16.2 C17.2 C18.2 C60.1 C61.1 C91.1 L4.2 U1.N8 U1.P6 U1.P7 U1.P8 U1.P9 U1.R6 U1.R7 U1.R8 U1.T6 U1.T7 U1.T8 U1.U6 U1.U9
AP-RESET#: C26.2 Q1.2(E) R6.1 U1.V6
GPIOA7/BT-HOST-WAKE: U1.D8 U10.7
GPIOA8/BT-WAKE: R53.2 U1.F13 U10.6
GPIOA10/STATUS-LED: R38.2 U1.E11
GPIOG10/WL-WAKE-AP: U1.M3 U10.13
GPIOG12/USB0-OTGID: D27.1 J1.4 R22.2 U1.D1
GPIOG13/BT-RST-N: U1.B1 U10.34
GPIOL6/CPUX-VSET: M4.1 R65.1 U1.T4
GPIOL7/WIFI-EN: R48.2 U1.T3 U10.12
HCEC: Q2.2(SOURCE) R46.1 U1.G5
HDMI-3V: D26.1 FB1.2 Q2.1 R46.2
HDMI-5V: D24.1 D25.2 HCON1.18 R44.2 R45.2
HHPD: R41.1 R42.1 U1.M2
HSCL: D22.1 HCON1.15 R44.1 U1.H3
HSDA: D21.1 HCON1.16 R45.1 U1.K3
HTX0N: R71.1 U1.F1
HTX0P: R70.1 U1.G1
HTX1N: R69.1 U1.G2
HTX1P: R68.1 U1.H2
HTX2N: R67.1 U1.J2
HTX2P: R66.1 U1.J1
HTXCN: R73.1 U1.E2
HTXCP: R72.1 U1.F2
I2C0_SCL: R80.1 R82.1 U1.F11
I2C0_SDA: R81.1 R83.1 U1.C13
NDQ0: U1.B18 U6.H3
NDQ1: U1.C17 U6.H4
NDQ2: U1.D17 U6.H5
NDQ3: U1.C18 U6.J2
NDQ4: U1.B17 U6.J3
NDQ5: U1.B19 U6.J4
NDQ6: U1.F17 U6.J5
NDQ7: U1.C19 U6.J6
NDQS: U1.H16 U6.U5
NRB0: R24.2 U1.E16 U6.W5
NRB1: R25.2 U1.A16
NRE: R26.2 TP1.1 U6.W6
PCM0_CLK: R57.1 U1.B14
PCM0_DIN: R56.1 U1.A14
PCM0_DOUT: R58.1 U1.A13
PCM0_SYNC: R59.1 U1.B13
POWER-KEY: ESD3.1 R39.1 SW3.3 SW3.4(6) U1.R1
PWR-DRAM: R11.1 U1.M6 U2.2
PWR-LED: R36.1 R37.2 U1.V2
PWR-STB: R10.1 U1.T2 U4.5 U5.5
RECOVERY: ESD1.1 R34.1 SW1.3 SW1.4(6) U1.N2
SA0: DU1.N3 U1.T17
SA1: DU1.P7 U1.U18
SA2: DU1.P3 U1.V19
SA3: DU1.N2 U1.V20
SA4: DU1.P8 U1.V21
SA5: DU1.P2 U1.Y19
SA6: DU1.R8 U1.Y20
SA7: DU1.R2 U1.V15
SA8: DU1.T8 U1.W18
SA9: DU1.R3 U1.Y18
SA10: DU1.L7 U1.P19
SA11: DU1.R7 U1.N19
SA12: DU1.N7 U1.R18
SA13: DU1.T3 U1.V12
SA14: DU1.T7 U1.N17
SA15: DU1.M7 U1.R17
SBA0: DU1.M2 U1.W17
SBA1: DU1.N8 U1.T18
SBA2: DU1.M3 U1.V17
SCAS: DU1.K3 U1.U15
SCKE0: DU1.K9 U1.AA21
SCKE1: DU1.J9 U1.Y21
SCKN: DR6.1 DU1.K7 U1.AA20
SCKP: DR6.2 DU1.J7 U1.AA19
SCS0: DU1.L2 U1.W20
SCS1: DU1.L1 U1.W21
SDC0-CLK: R30.1 U1.D20
SDC0-CMD: D9.1 J2.3 R28.2 U1.F18
SDC0-D0: D11.1 J2.7 U1.A19
SDC0-D1: D12.1 J2.8 U1.D19
SDC0-D2: D7.1 J2.1 U1.C20
SDC0-D3: D8.1 J2.2 R31.2 U1.E21
SDC0-DET: D13.1 J2.9 R29.2 U1.G18
SDQ0: DU1.F8 U1.N20
SDQ1: DU1.H8 U1.P21
SDQ2: DU1.F7 U1.P20
SDQ3: DU1.E3 U1.U21
SDQ4: DU1.H7 U1.R19
SDQ5: DU1.F2 U1.T20
SDQ6: DU1.H3 U1.U19
SDQ7: DU1.G2 U1.U20
SDQ8: DU1.D7 U1.J19
SDQ9: DU1.C8 U1.H20
SDQ10: DU1.B8 U1.H21
SDQ11: DU1.A7 U1.J21
SDQ12: DU1.C3 U1.L20
SDQ13: DU1.C2 U1.L21
SDQ14: DU1.A2 U1.M21
SDQ15: DU1.A3 U1.M19
SDQM0: DU1.E7 U1.M20
SDQM1: DU1.D3 U1.G20
SDQS0N: DU1.G3 U1.R21
SDQS0P: DU1.F3 U1.R20
SDQS1N: DU1.B7 U1.J20
SDQS1P: DU1.C7 U1.K20
SODT0: DU1.K1 U1.W11
SODT1: DU1.J1 U1.V11
SPI0_CLK/GPIOC2: R78.1 U1.B16
SPI0_CS/GPIOC3: R79.1 U1.B15
SPI0_MISO/GPIOC1: R77.1 U1.C16
SPI0_MOSI/GPIOC0: R76.1 U1.C15
SRAS: DU1.J3 U1.V13
SRST: DU1.T2 U1.U16
SVREF: DC1.1 DC13.2 DC14.2 DC19.2 DC20.2 DR4.1 DR5.2 DU1.H1 DU1.M8 U1.T16
SWE: DU1.L3 U1.W13
TX1-0+: HCON1.7 R70.2 U9.1 U9.10
TX1-0-: HCON1.9 R71.2 U9.2 U9.9
TX1-1+: HCON1.4 R68.2 U8.4 U8.7
TX1-1-: HCON1.6 R69.2 U8.5 U8.6(OUT4)
TX1-2+: HCON1.1 R66.2 U8.1 U8.10
TX1-2-: HCON1.3 R67.2 U8.2 U8.9
TX1-C+: HCON1.10 R72.2 U9.4 U9.7
TX1-C-: HCON1.12 R73.2 U9.5 U9.6(OUT4)
TX1-CEC: D23.1 HCON1.13 Q2.3 R47.2
UART0_RX: R40.1 U1.H6
UART0_TX: R75.1 U1.F5
UART3_CTS: U1.D15 U10.41
UART3_RTS: U1.F14 U10.44
UART3_RX: U1.G12 U10.42
UART3_TX: U1.E15 U10.43
UBOOT: ESD2.1 R35.1 SW2.3 SW2.4(6) U1.W6
USB0-DRVVBUS: R32.2 U1.P2 U7.4
USB-5V: C36.1 C37.1 C41.1 C42.1 C46.1 C47.1 C56.1 C57.1 C58.1 C59.1 C62.1 C65.1 C73.2 C90.1 D25.1 J3.1 M1.2(S) M2.2(S) U2.3(VIN) U3.2 U3.3(VIN) U4.8(SVIN) U4.9 U4.10 U5.8(SVIN) U5.9 U5.10 U7.5
USB-DM0: D5.1 J1.2 U1.B5
USB-DM2: D15.1 P1.2 U1.A8
USB-DP0: D6.1 J1.3 U1.A5
USB-DP2: D16.1 P1.3 U1.A7
VRA1: C34.2 U1.Y4
VRA2: C33.2 R7.2 U1.W5
VRP: C32.2 U1.V4
WIFI_32K: R4.2 U1.P3 U10.24
WL-SDIO-CLK: R54.1 U1.J3
WL-SDIO-CMD: U1.L2 U10.16
WL-SDIO-D0: R49.2 U1.H4 U10.18
WL-SDIO-D1: R50.2 U1.F3 U10.19
WL-SDIO-D2: R51.2 U1.C2 U10.14
WL-SDIO-D3: R52.2 U1.C1 U10.15
X24MI: C27.2 U1.K2 X1.1
X24MO: R8.2 U1.K1
X32KI: C9.2 R5.2 U1.V5 Y1.2
X32KO: C20.2 R5.1 U1.U4 Y1.1
N20670285: C74.2 C75.2 D14.1 P1.1(VBUS) U7.1(OUT)
N20670632: R33.2 U7.3
N20770332: C4.2 R74.1 U1.N3
N20772561: C35.2 R8.1 X1.3(XOUT)
N20779991: R26.1 U1.A17
N21107081: R1.1 U1.T9
N21137542: L1.1 U2.4
N21137577: C40.1 R12.1 R13.2 U2.6
N21465076: L3.1 U4.1 U4.2 U4.3
N21465111: C51.1 R16.1 R17.2 U4.6
N21488460: D10.1 J2.5 R30.2
N21608402: DR3.1 U1.V10
N21610006: DR1.2 DU1.L8
N21610234: DR2.2 DU1.L9(ZQ1)
N21715684: C76.1 D19.1 HCON1.2 HCON1.5 HCON1.8 HCON1.11 HCON1.17 R43.2
N21715724: D20.1 HCON1.19 R41.2
N21716107: D26.2 R47.1
N21871750: C66.2 C67.2 U6.K2
N21924762: C55.2 R18.1 R19.2 R64.2 U5.6
N21924770: L4.1 U5.1 U5.2 U5.3
N22051153: L2.1 U3.4
N22051175: C45.1 R14.1 R15.2 U3.6
N22088009: R3.2 U1.AA5
N22169328: R27.1 U1.F16
N22178818: D4.1 J1.1(VBUS) R23.2
N22184301: D2.1 D3.2(K) M1.3 M3.2(S) R23.1
N22196440: R54.2 U10.17
N22196510: C78.1 C79.2 U10.2
N22196536: R55.1 U10.29
N22197121: L5.1 U10.21
N22197124: C85.1 L5.2 U10.23
N22197956: C87.2 U10.11(XTAL_OUT) Y2.3
N22198040: C86.2 U10.10 Y2.1
N22198617: ANT1.2 C78.2 C80.2
N22202158: R2.2 U1.AA6
N22211457: D17.1 R37.1
N22211466: D18.1 R38.1
N22212627: R56.2 U10.25
N22212634: R57.2 U10.26
N22212637: R58.2 U10.27
N22212640: R59.2 U10.28
N22216920: J3.3 R75.2
N22216923: J3.4 R40.2
N22264281: M2.1 M3.1 M3.3 R63.2
N22264339: M1.1 M2.3 R62.2
N22265421: M4.3 R64.1
N22312902: J4.4 R79.2
N22312905: J4.3 R78.2
N22312908: J4.2 R77.2
N22312911: J4.1 R76.2
N22312967: J5.2 R80.2
N22312970: J5.3 R81.2
N212010590: C3.1 U1.H11

Pads without a net: HCON1 14; U1 A1 A2 A3 A4 A10 A11 A20 AA2 AA3 AA8 AA9 AA11 AA12 AA14 AA15 AA17 AA18 B2 B3 B4 B6 B7 B8 B9 B10 B11 B12 B20 B21 C3 C5 C6 C7 C8 C9 C10 C11 C12 C14 C21 D2 D3 D5 D6 D10 D11 D13 E3 E8 E10 E13 E14 E18 E19 E20 F6 F7 F10 F19 F20 F21 G4 H17 H18 H19 K4 K17 K18 L5 L17 L18 L19 M1 N1 R2 T5 U2 V1 W1 W2 W3 W9 W12 W15 Y1 Y2 Y3 Y7 Y8 Y9 Y10 Y11 Y12 Y13 Y14 Y15 Y16 Y17; U2 1; U3 1; U4 4 7; U5 4 7; U6 A4 A6 A9 A11 AA1 AA2 AA7 AA8 AA9 AA10 AA11 AA12 AA13 AA14 AE1 AE14 AG2 AG13 AH4 AH6 AH9 AH11 B2 B13 D1 D14 H1 H2 H7 H8 H9 H10 H11 H12 H13 H14 J1 J7 J8 J9 J10 J11 J12 J13 J14 K1 K3 K5 K7 K8 K9 K10 K11 K12 K13 K14 L1 L2 L3 L4 L12 L13 L14 M1 M2 M3 M5 M8 M9 M10 M12 M13 M14 N1 N2 N3 N10 N12 N13 N14 P1 P2 P3 P10 P12 P13 P14 R1 R2 R3 R5 R12 R13 R14 T1 T2 T3 T12 T13 T14 U1 U2 U3 U6 U7 U10 U12 U13 U14 V1 V2 V3 V12 V13 V14 W1 W2 W3 W7 W8 W9 W10 W11 W12 W13 W14 Y1 Y3 Y6 Y7 Y8 Y9 Y10 Y11 Y12 Y13 Y14; U10 4 5 8 30 32 35 37 38 39 40

## Via types
v1: diameter 0.406, hole 0.203, TOP to BOTTOM, 829 vias

## Routing (per net, layer and track width the routed paths; a pad name or vN(x,y) marks a point on that pad's centre or on a via; arc(x,y) is an arc through that point)
AGND: length 12.4
  TOP w0.254: v1(33.08,25) U1.U3 ; C33.1 R7.1 C34.1 32.24,19.48 32.24,19.48 v1(31.78,19.48)
  BOTTOM w0.254: R9.2 33.46,24.39 33.08,24.77 v1(33.08,25) 32.93,25 C30.1 32.12,24.94 C29.1 31.83,25.21 31.01,24.4 31.01,21.46 31.78,20.7 v1(31.78,19.48)
AVCC: length 5.1
  TOP w0.254: FB2.2 30.9,21.26 v1(31.52,21.88) ; U1.V3 v1(33.08,23.7)
  BOTTOM w0.254: v1(31.52,21.88) 31.52,22.43 31.83,22.73 C29.2 31.94,23.53 32.23,23.83 32.87,23.83 C30.2 32.99,23.7 v1(33.08,23.7)
GND: length 341.2
  TOP w0.102: D7.2 v1(48.39,47.24) ; D15.2 v1(29.14,51.18) ; R63.1 20.95,50.94 21.13,51.12 v1(21.57,51.12) ; D13.2 v1(48.39,38.61) ; D12.2 v1(48.39,39.62) ; D11.2 v1(48.39,40.64) ; D9.2 v1(48.39,45.21) ; D27.2 v1(10.79,51.23) ; v1(35.63,49.7) 35.63,49.32 35.63,49.31 35.63,48.93 U6.Y2 ; D8.2 v1(48.39,46.23) ; D5.2 v1(13.34,51.23) ; D16.2 v1(25.32,50.55) ; D2.2 v1(21.57,51.89) ; D4.2 v1(14.35,51.23) ; D10.2 v1(48.39,42.93) ; U1.A21 v1(45.62,35.08) ; ANT1.1 v1(1.57,48.9) ; D6.2 v1(11.81,51.23)
  TOP w0.127: C86.1 v1(4.47,32.26) 4.13,31.91 Y2.4 5.15,30.71 5.19,30.76 v1(5.59,30.76) C87.1 ; R42.2 v1(12.77,22.81) ; v1(42.42,46.43) 42.18,46.67 U6.H6 ; DC13.1 59.05,21.52 58.63,21.09 58.63,21.09 ; U6.Y5 U6.AA6 35.08,46.37 v1(34.94,46.37) 34.94,42.48 35.31,42.11 37.59,42.11 v1(38.8,40.91) ; 61.28,25.27 61.21,25.27 60.91,25.58 DC8.1 60.91,25.76 61.15,26 61.26,26 ; U1.G8 U1.H8 U1.J9 U1.K9 ; U1.AA1 v1(32.44,22.4) ; DU1.A9 57.64,28.83 v1(57.64,28.78) ; v1(35.63,49.7) 36.15,50.22 37.73,50.22 37.93,50.01 v1(38.33,50.01) 38.72,50.01 38.93,50.22 41.71,50.22 v1(42.04,49.89) ; U1.N13 v1(40.23,27.6) ; U6.AA4 v1(34.93,47.67) ; U1.N14 v1(40.23,26.95) ; Y2.2 v1(2.22,27.1)
  TOP w0.203: v1(39.41,46.17) 38.92,46.66 v1(38.66,46.66) 38.66,46.95 U6.P5 v1(38.88,47.66) 38.21,47.66 37.88,47.33 U6.T5 ; v1(39.41,46.17) 39.1,45.87 39.1,45.86 v1(38.56,45.31) ; v1(39.41,46.17) U6.M7 ; v1(38.56,45.31) 38.38,45.14 U6.R10 ; v1(38.56,45.31) 38.2,45.67 U6.U8 37.04,45.67 v1(36.88,45.52) ; v1(49.85,5.18) C25.1 48.92,4.47 48.89,4.44 v1(48.46,4.44) Q1.1 ; R27.2 v1(40.13,38.79) ; v1(41.68,58.72) 41.17,58.72 D18.2 ; U6.K4 v1(40.39,47.18) ; D17.2 v1(54,1.41) ; C26.1 v1(44.08,2.65)
  TOP w0.254: v1(12.23,13.08) U9.8 U9.3 v1(14.44,13.08) ; U1.M7 v1(36.33,27.6) ; v1(36.33,27.6) U1.M8 ; v1(36.33,27.6) U1.N7 ; v1(39.58,26.95) U1.P12 ; v1(39.58,26.95) U1.N12 ; v1(39.58,26.95) U1.P13 ; v1(39.58,26.95) U1.N13 ; U1.P12 v1(38.93,26.3) ; U1.P12 v1(38.93,26.95) ; U1.P12 v1(39.58,26.3) ; v1(60.68,15.47) DC20.1 ; DC20.1 DR5.1 ; DC20.1 59.74,16.08 DC11.1 v1(58.54,15.92) v1(57.64,16.83) DU1.T9 ; v1(13.34,51.23) v1(14.35,51.23) R62.1 ; U1.M8 v1(36.98,28.25) ; U1.M8 v1(36.98,27.6) ; v1(51.24,27.18) DU1.D1 50.86,26.75 v1(50.49,26.38) DU1.E1 DU1.E2 ; v1(36.98,28.25) U1.M9 ; v1(36.98,28.25) U1.L8 v1(36.98,28.9) ; v1(36.98,28.25) U1.L9 v1(36.98,28.9) ; v1(40.23,27.6) U1.M13 v1(39.58,27.6) ; v1(40.23,27.6) U1.N13 ; v1(40.23,27.6) 40.23,27.6 U1.M14 v1(40.88,27.6) ; v1(40.23,27.6) U1.N14 ; U1.N12 v1(38.93,26.95) ; U1.N12 v1(38.93,27.6) ; U1.N12 v1(39.58,27.6) ; v1(38.93,26.95) U1.N11 ; v1(38.93,26.95) U1.P11 ; v1(38.93,27.6) U1.M12 v1(39.58,27.6) ; v1(38.93,27.6) U1.M11 v1(38.28,27.6) ; v1(38.93,27.6) U1.N11 ; X1.4 25.13,24.53 25.12,24.54 ; v1(61.76,26) 61.26,26 DC8.1 ; v1(37.63,27.6) U1.M10 v1(38.28,27.6) ; v1(37.63,27.6) U1.N9 ; v1(37.63,27.6) U1.N10 ; v1(37.63,27.6) U1.M9 ; v1(36.98,28.9) U1.K8 ; v1(36.98,28.9) U1.K9 ; v1(50.49,28.78) DU1.B1 ; U1.N9 v1(37.63,26.95) ; U1.N9 v1(36.98,27.6) ; v1(37.63,26.3) U1.R10 ; v1(37.63,26.3) U1.R9 ; v1(37.63,26.3) U1.P10 ; U1.R10 v1(38.28,26.3) ; U1.R10 v1(38.28,25.65) ; U1.N10 v1(38.28,26.95) ; U1.N10 v1(38.28,27.6) ; U1.N10 v1(37.63,26.95) ; v1(38.28,26.95) U1.P10 ; v1(38.28,26.95) U1.N11 ; v1(38.28,26.95) U1.P11 ; v1(38.28,27.6) U1.N11 ; U1.M9 v1(36.98,27.6) ; v1(40.88,28.9) U1.K14 v1(40.23,29.55) ; v1(40.88,28.9) U1.K15 U1.K16 v1(42.18,29.55) U1.J16 ; v1(40.88,28.9) U1.L15 v1(40.88,28.25) U1.M15 v1(40.88,27.6) ; DU1.G8 v1(56.86,24.8) DU1.G9 v1(57.94,24.4) 58.81,24.4 58.98,24.23 DC10.1 DR2.1 DR1.1 v1(62.33,24.23) ; v1(42.04,49.89) v1(43.76,49.89) 44.93,49.89 v1(45.33,49.49) v1(46.29,48.53) 46.84,47.98 v1(46.84,47.37) v1(46.84,46.23) v1(46.84,45.06) v1(46.84,43.94) v1(46.84,42.67) v1(46.84,41.43) v1(46.84,40.01) v1(46.84,38.58) v1(45.64,37.39) ; v1(37.63,26.95) U1.P10 ; U1.N13 v1(39.58,27.6) ; U1.N13 v1(40.23,26.95) ; D19.2 v1(14.61,18.03) ; v1(20.59,1.32) 20.59,1.32 SW1.1 ; J2.13 v1(62.61,51.96) ; U1.P10 v1(38.28,26.3) ; U1.J16 v1(42.18,30.2) ; U1.J16 U1.H15 ; v1(40.88,27.6) U1.N15 v1(40.88,26.95) ; v1(40.88,27.6) U1.N14 ; U1.H12 v1(39.59,30.2) U1.J13 v1(40.23,29.55) ; v1(39.58,26.3) U1.R13 v1(40.23,26.3) ; v1(39.58,26.3) U1.P13 ; v1(39.58,26.3) U1.R12 v1(38.93,26.3) ; J2.10 v1(54.04,37.39) ; DU1.M1 v1(50.49,20.03) ; v1(34.82,27.44) 34.71,27.56 U1.M5 ; v1(40.88,26.95) U1.N14 ; v1(40.88,26.95) U1.P15 v1(40.88,26.3) ; v1(40.88,26.95) U1.P14 ; D23.2 v1(14.61,14.99) ; DU1.M9 57.95,20.4 v1(58.31,20.76) 59.05,21.51 ; DU1.J8 v1(56.84,22.43) ; U1.T11 v1(38.28,25.65) ; v1(38.28,25.65) U1.R11 ; v1(40.23,26.95) U1.P13 ; v1(40.23,26.95) U1.P14 ; U1.P13 v1(40.23,26.3) ; v1(52.09,28.78) DU1.B3 ; SW1.2 v1(21.39,8.15) ; DC12.1 v1(58.65,18.16) 58.44,18.16 58.17,18.43 v1(57.64,18.43) DU1.P9 ; DC14.1 49.03,24.73 v1(49.34,24.43) 49.63,24.14 50.6,24.14 DU1.G1 ; v1(38.93,26.3) U1.R11 ; v1(38.93,26.3) U1.P11 ; 59.05,21.51 59.59,21.51 DC13.1 v1(60.2,21.52) ; 59.05,21.51 59.05,21.52 ; SW2.2 v1(27.99,6.49) ; U1.P11 v1(38.28,26.3) ; v1(40.88,26.3) U1.P14 ; v1(40.88,26.3) U1.R14 v1(40.23,26.3) ; U1.P14 v1(40.23,26.3) ; v1(38.28,26.3) U1.R11 ; D21.2 v1(14.61,17.02) ; v1(40.23,29.55) U1.K13 ; v1(39.55,40.16) v1(38.8,40.91) 38.8,41.08 v1(39.42,41.71) 39.88,42.16 v1(41.4,42.16) ; v1(56.84,27.18) DU1.D8 v1(56.86,26.4) DU1.E8 ; D22.2 v1(14.61,16) ; DU1.P1 v1(50.49,18.43) ; v1(61.76,25.27) 61.28,25.27 DC8.1 ; DC8.1 60.77,25.5 DC7.1 v1(58.9,25.5) 58.61,25.2 v1(57.94,25.2) DU1.F9 ; DU1.B9 v1(57.64,28.78) 57.26,29.15 DU1.A9 v1(57.64,29.58) ; v1(12.23,10.29) U8.8 U8.3 v1(14.44,10.29) ; 24.97,26.97 24.96,26.99 24.96,27.67 25.48,28.19 v1(27.25,28.19) 27.25,27.95 28.13,27.08 X1.2 28.18,26.98 C35.1 ; SW3.1 v1(35.43,1.19) ; SW3.2 v1(35.43,7.19) ; R55.2 v1(20.67,39.48) ; SW2.1 v1(28.83,1.32) ; DU1.J2 v1(51.29,22.43) ; U1.K7 v1(35.67,28.89) ; J2.12 v1(54.04,51.99) ; DU1.T1 v1(50.49,16.83) ; J2.11 v1(62.61,38.32) ; D24.2 v1(14.61,19.05) ; D20.2 v1(14.61,20.07)
  TOP w0.305: U2.5 U2.7
  TOP w0.508: C85.2 14.94,27.56 14.43,28.07 v1(14.43,31.05) U10.20 v1(14.43,32.91) ; v1(16.5,42.18) U10.33 v1(18.37,42.18) ; v1(18.37,40.38) U10.31 v1(16.5,40.38) ; v1(53.61,41.89) J2.6 v1(51.09,41.89) ; v1(14.43,42.45) U10.36 v1(14.43,44.31)
  L3 w0.203: v1(24.59,46.08) 25.37,46.08 v1(25.4,46.1) v1(26.42,46.1) 27.08,46.1 v1(27.2,45.97) 27.58,45.59 27.58,45.57 v1(27.89,45.26)
  BOTTOM w0.127: v1(35.63,49.7) 36.22,50.29 38.05,50.29 v1(38.33,50.01) 38.33,48.22 v1(38.88,47.66) 38.88,46.88 v1(38.66,46.66) ; DC19.1 56.86,24.8 v1(56.86,24.8) ; v1(39.41,46.17) 38.92,46.66 v1(38.66,46.66) ; DC6.1 50.48,20.03 v1(50.49,20.03) ; v1(57.64,29.58) 57.64,30.12 57.58,30.17 DC5.1 57.9,31.02 DC2.1 ; v1(52.09,28.78) DC9.1 ; v1(40.13,38.79) 40.13,39.58 v1(39.55,40.16) v1(38.8,40.91) 38.28,41.43 37.69,41.43 35.63,43.49 C69.1 ; v1(50.49,16.83) 50.47,16.83 DC4.1 ; v1(38.66,46.66) 37.85,46.66 37.59,46.41 37.59,43.81 38.48,42.93 39.42,42.93 v1(40.89,41.45) 40.51,41.07 40.06,41.07 v1(39.42,41.71) 38.89,42.24 38.3,42.24 36.88,43.66 v1(36.88,44.42) v1(36.88,45.52) ; DC3.1 50.12,28.78 v1(50.49,28.78) ; C68.1 39.72,45.27 39.93,45.06 39.93,43.64 v1(41.4,42.16) 42.42,42.16 42.8,42.55 44.81,42.55 46.2,43.94 v1(46.84,43.94)
  BOTTOM w0.203: v1(42.04,49.89) 42.04,47.9 41.31,47.18 v1(40.39,47.18) ; C20.1 32.6,19.81 32.93,19.48 36.8,19.48 37.3,19.98 37.3,22.01 36.75,22.56 C9.1
  BOTTOM w0.254: C74.1 32.69,50.75 33.23,50.2 C75.1 ; C74.1 32.64,50.8 32.14,51.29 v1(31.88,51.29) U7.2 ; C74.1 v1(32.64,50.04) ; C28.1 47.72,45.21 v1(48.39,45.21) ; D14.2 v1(36.65,51.94) ; ESD2.2 v1(29.92,1.32) ; v1(38.56,45.31) 39.2,45.31 C68.1 39.41,45.43 v1(39.41,46.17) ; v1(40.39,47.18) 40.39,47.64 40.49,47.73 C67.1 C66.1 39.06,48.63 38.88,48.45 v1(38.88,47.66) ; C72.1 v1(56.35,44.92) ; C72.1 v1(56.35,43.22) ; C72.1 v1(57.23,44.07) ; v1(45.62,35.08) 45.62,35.47 45.64,35.5 v1(45.64,37.39) v1(46.84,38.58) v1(46.84,40.01) v1(46.84,41.43) v1(46.84,42.67) v1(46.84,43.94) v1(46.84,45.06) v1(46.84,46.23) v1(46.84,47.37) 46.84,47.98 v1(46.29,48.53) v1(45.33,49.49) 44.93,49.89 v1(43.76,49.89) v1(42.04,49.89) ; v1(11.79,50.15) C62.2 13.21,51.1 v1(13.34,51.23) ; C1.1 35.8,32.14 C77.1 C2.2 v1(34.56,32.47) ; v1(25.48,14.83) 25.93,14.83 26.01,14.91 26.8,14.91 ; R33.1 R32.1 v1(29.01,49.78) ; C71.1 42,46.01 v1(42.42,46.43) ; C70.1 v1(35.63,49.7) ; v1(4.54,38.63) 5.33,37.83 C82.2 ; C65.2 14.73,50.85 v1(14.35,51.23) ; C9.1 37.03,22.88 R1.2 36.15,23.46 35.21,24.39 R9.1 34.88,24.54 C14.1 33.86,25.57 v1(33.86,26.31) C4.1 33.86,26.53 34.86,27.53 C17.1 ; ESD3.2 v1(36.51,1.19) ; v1(7.25,38.09) 6.99,37.82 C81.2 ; v1(40.23,29.55) 40.23,29.69 C24.1 39.54,30.39 C3.2 ; ESD1.2 v1(23.32,1.32) ; M4.2 v1(24.53,8.58) 24.85,8.9 24.85,9 v1(25.5,9.65) ; C69.1 35.52,45.88 35.03,46.37 v1(34.94,46.37) ; R31.1 v1(53.64,46.23)
  BOTTOM w0.305: U3.5 U3.7
  BOTTOM w0.508: C76.2 4.21,16.72 R43.1 3.91,18.63 2.93,19.61 HCON1.22 ; C84.2 14.81,33.28 v1(14.43,32.91) 14.43,32.09 C83.2 14.43,31.92 v1(14.43,31.05)
  BOTTOM w0.635: v1(26.04,51.31) 26.21,51.13 C73.1
  vias: v1(0.71,48.34) v1(0.71,47.19) v1(0.84,35.41) v1(0.81,34.37) v1(0.81,33.43) v1(0.81,32.51) v1(0.81,31.57) v1(0.81,30.73) v1(0.81,29.24) v1(0.81,27.97) v1(0.81,26.42) v1(0.81,25.17) v1(0.89,44.22) v1(0.94,40.16) v1(0.89,38.66) v1(0.86,36.91) v1(0.86,23.5) v1(1.04,56.21) v1(1.04,45.97) v1(1.02,41.27) v1(1.14,58.27) v1(1.09,54.2) v1(1.14,52.15) v1(1.14,50.14) v1(1.14,15.19) v1(1.14,12.37) v1(1.14,4.85) v1(1.19,18.59) v1(1.17,9.98) v1(1.17,7.75) v1(1.27,1.65) v1(1.75,44.98) v1(1.91,40.49) v1(1.98,59.87) v1(1.96,43.54) v1(2.57,25.2) v1(2.67,1.12) v1(2.84,56.64) v1(2.87,49.4) v1(2.9,34.85) v1(3.1,40.41) v1(3.23,52.76) v1(3.71,50.22) v1(4.19,43.36) v1(4.34,49.35) v1(4.32,25.32) v1(4.45,44.42) v1(4.39,42.24) v1(4.52,55.6) v1(4.55,40.41) v1(4.62,59.89) v1(4.62,58.06) v1(4.78,45.62) v1(4.93,1.09) v1(5.13,12.29) v1(5.33,50.32) v1(5.28,43.03) v1(5.26,9.25) v1(5.54,47.47) v1(5.54,3.84) v1(5.61,49.12) v1(5.66,46.1) v1(5.89,23.47) v1(6.2,54.1) v1(6.35,22.12) v1(6.53,51.69) v1(6.6,56.87) v1(7.24,59.92) v1(7.42,41.83) v1(7.67,1.07) v1(7.77,53.19) v1(8.56,54.71) v1(9.37,54.71) v1(9.55,33.68) v1(9.93,40.41) v1(10.13,54.71) v1(10.13,38.91) v1(10.21,36.17) v1(10.72,41.99) v1(10.77,1.02) v1(10.87,3.84) v1(11.23,38.89) v1(11.28,40.41) v1(11.3,37.54) v1(12.32,58.69) v1(12.32,41.99) v1(12.34,33.63) v1(12.67,40.41) v1(12.67,36.32) v1(12.78,38.91) v1(12.85,37.62) v1(12.9,5.99) v1(13.28,33.6) v1(13.59,1.04) v1(13.69,50.14) v1(13.84,41.96) v1(13.92,40.41) v1(14.25,38.91) v1(14.38,36.32) v1(14.53,3.45) v1(14.55,37.54) v1(15.19,40.41) v1(15.39,5.38) v1(15.47,41.91) v1(15.47,38.94) v1(15.7,36.3) v1(15.77,37.59) v1(16.1,1.12) v1(16.76,54.23) v1(17.22,57.61) v1(17.2,56.49) v1(17.32,58.88) v1(17.37,52.5) v1(17.86,60.02) v1(18.54,1.14) v1(19.05,56.92) v1(19.66,5.84) v1(20.5,57.28) v1(20.93,59.54) v1(22.76,50.22) v1(23.14,47.04) v1(23.24,48.77) v1(23.75,47.7) v1(24,23.27) v1(24,22.48) v1(23.98,21.69) v1(24.08,24.23) v1(24.73,26.04) v1(24.79,25.18) v1(24.79,24.46) v1(24.79,23.27) v1(24.79,22.48) v1(24.82,21.74) v1(24.92,16.71) v1(25.15,43.1) v1(25.1,16.08) v1(25.5,59.74) v1(26.11,58.57) v1(26.59,43.1) v1(26.8,0.99) v1(27.08,14.45) v1(27.08,13.56) v1(27.33,59.79) v1(27.32,20.88) v1(27.86,56.24) v1(27.89,14.45) v1(27.89,13.56) v1(28.04,9.02) v1(28.17,43.81) v1(28.63,44.73) v1(28.7,14.45) v1(28.7,13.56) v1(29.44,43.92) v1(29.74,44.78) v1(29.92,14.53) v1(30,9.45) v1(30.1,23.7) v1(30.25,57.3) v1(30.4,14.78) v1(30.56,58.5) v1(32.11,58.39) v1(32.92,12.67) v1(33.22,56.67) v1(33.17,6.27) v1(33.38,0.94) v1(33.68,58.83) v1(33.68,12.67) v1(34.65,12.67) v1(35.46,12.73) v1(35.84,13.39) v1(36.51,13.39) v1(36.53,7.85) v1(36.84,19.47) v1(37.01,15.14) v1(37.26,9.22) v1(37.87,15.34) v1(39.24,12.7) v1(39.85,9.27) v1(40.03,7.7) v1(40.18,0.99) v1(40.67,11.33) v1(41.25,4.06) v1(41.94,8.84) v1(42.52,7.65) v1(42.77,6.07) v1(42.85,2.29) v1(44.93,7.59) v1(46.46,1.07) v1(46.89,7.77) v1(48.03,7.49) v1(48.69,1.02) v1(49.12,7.75) v1(49.94,1.02) v1(50.67,7.54) v1(51.71,5.84) v1(51.79,1.02) v1(51.92,7.77) v1(53.49,35.89) v1(54.15,50.09) v1(54.81,39.83) v1(55.17,8) v1(55.47,1.32) v1(56.41,39.12) v1(56.54,37.44) v1(56.57,35.81) v1(56.72,52.48) v1(56.74,1.02) v1(56.77,49.17) v1(56.79,40.51) v1(56.95,51.18) v1(56.9,34.49) v1(56.9,7.95) v1(57.02,47.42) v1(57.23,46.08) v1(57.48,41.81) v1(57.45,9.3) v1(57.89,35.59) v1(58.12,10.31) v1(58.9,35.03) v1(59.08,33.32) v1(59.23,1.04) v1(59.28,11.51) v1(59.46,53.01) v1(60.2,34.16) v1(60.43,13.69) v1(60.73,12.22) v1(61.01,33.02) v1(61.16,31.67) v1(61.62,1.04) v1(61.85,30.12) v1(61.87,13.77) v1(62.99,30.2) v1(62.99,1.07) v1(63.17,50.85) v1(63.17,2.36) v1(63.3,44.25) v1(63.27,42.75) v1(63.42,46.28) v1(63.42,45.29) v1(63.37,34.98) v1(63.45,33.58) v1(63.37,29.26) v1(63.42,4.39) v1(63.47,14.4) v1(63.53,6.63) v1(63.63,49.86) v1(63.55,31.85) v1(63.55,28.24) v1(63.7,54.38) v1(63.68,27.38) v1(63.73,26.42) v1(63.73,25.43) v1(63.7,24.51) v1(63.73,23.55) v1(63.7,22.5) v1(63.73,21.34) v1(63.7,20.04) v1(63.7,18.95) v1(63.7,17.78) v1(63.68,16.66) v1(63.65,12.73) v1(63.83,15.52) v1(63.78,9.17)
VCC-1V2: length 34.5
  TOP w0.254: v1(38.28,28.9) U1.K10 v1(38.28,29.55) ; v1(38.28,28.9) U1.L10 ; v1(38.28,28.9) U1.L11 v1(38.93,28.9) ; v1(38.28,28.9) U1.K11 ; U1.K11 v1(38.93,28.9) ; U1.K11 v1(38.28,29.55) ; U1.K11 v1(38.93,29.55) ; v1(38.93,28.9) U1.L12 v1(39.58,28.9) ; v1(38.93,28.9) U1.K12 ; U1.K12 v1(39.58,28.9) ; U1.K12 v1(38.93,29.55) ; U1.K12 v1(39.58,29.55) U1.J12 ; v1(39.58,28.9) U1.L13 v1(40.23,28.9) U1.L14 ; U1.J11 v1(38.93,30.2) U1.J12 ; U1.J11 v1(38.28,29.55) ; U1.J11 v1(38.93,29.55) ; U1.J11 v1(38.28,30.2) ; v1(38.28,29.55) U1.J10 ; v1(38.93,29.55) U1.J12 ; U1.J10 37.96,29.88 v1(37.64,30.2) U1.H10 v1(38.28,30.2) ; U1.J10 v1(38.28,30.2)
  L3 w0.102: v1(24.72,19.05) 24.72,20.64 27.85,23.77 27.85,28.65 31.39,32.19 34.14,32.19 34.41,31.93
  BOTTOM w0.127: v1(24.72,19.05) 24.21,19.05 C51.2 R16.2
  vias: v1(28.33,23.41) v1(28.33,22.87) v1(28.47,21.31) v1(28.98,23.41) v1(28.98,22.87) v1(29.32,27.75) v1(29.81,22.92)
VCC-3V3: length 194.8
  TOP w0.102: R50.1 R49.1 v1(12.45,28.24) ; R51.1 v1(9.4,28.24) ; R51.1 R48.1 ; R51.1 R52.1 ; R22.1 9.78,45.92 v1(10.34,45.36) ; R28.1 v1(48.39,44.2) ; 38.28,31.5 38.28,31.5 ; R4.1 v1(20.68,33.15) ; R29.1 v1(48.39,37.59)
  TOP w0.127: R53.1 3,37.09 v1(5.1,34.98) ; v1(25.34,20.21) 26.39,20.21 26.57,20.38 R3.1 ; R83.2 v1(42.29,55.31) ; v1(38.28,32.16) 38.28,31.5 ; R82.2 v1(43.29,55.31)
  TOP w0.203: v1(49.85,2.66) C25.2 47.95,3.35 47.94,3.35 v1(47.51,3.35) Q1.3 ; v1(38.38,44.17) 38.27,44.17 37.88,44.56 U6.T10 U6.U9 ; R36.2 v1(55.21,5.59) ; U6.Y4 35.88,47.67 U6.AA5 35.12,47.17 v1(34.94,46.99) ; U6.Y4 U6.AA3 35.15,48.17 v1(34.95,48.37) ; U6.Y4 U6.W4 ; U6.K6 40.7,46.67 40.4,46.37 v1(40.39,46.37) 40.08,46.67 U6.M6 U6.N5 39.38,47.4 v1(39.64,47.65) ; R25.1 v1(41.05,38.79) ; R6.2 v1(45.09,2.68)
  TOP w0.254: U1.H13 v1(40.23,30.85) ; v1(40.23,30.85) U1.G13 ; v1(40.23,30.85) U1.G14 v1(40.88,30.85) ; v1(40.23,30.85) U1.H14 ; U1.K6 35.03,29.55 U1.J6 U1.H7 v1(35.68,30.85) U1.G7 ; U1.G11 38.28,31.5 U1.G10 U1.G9 v1(37.31,32.04) ; v1(40.88,30.85) U1.H14 ; v1(40.88,30.85) U1.G15 ; U1.H14 v1(40.88,30.2) ; v1(40.88,30.2) U1.J15 ; v1(40.88,30.2) U1.J14 ; FB2.1 R3.1
  TOP w0.508: v1(54.65,43.18) 53.78,44.05 53.78,44.09 ; J2.4 v1(53.59,44.09) 53.78,44.09 ; 53.78,44.09 v1(54.65,44.96)
  TOP w0.635: v1(5.1,34.98) U10.9 v1(6.99,34.98) 14.17,34.98 v1(16.23,32.91) U10.22 v1(16.23,31.05)
  L3 w0.254: v1(35.68,30.85) 35.68,32.36 35.67,32.37
  L3 w0.762: v1(19.53,2.94) v1(20.07,2.94) v1(23.98,2.94) 29.84,2.94 29.86,2.91 v1(30.57,2.91) 36.35,2.91 36.46,2.8 v1(37.18,2.8) 40.24,2.8 41.77,1.27 44.39,1.27 45.09,1.97 v1(45.09,2.68) 46.84,2.68 v1(47.51,3.35) 49.16,3.35 v1(49.85,2.66) 52.28,2.66 v1(55.21,5.59)
  L3 w1.016: v1(9.4,28.24) v1(9.4,24.97) v1(9.4,24.43) v1(9.4,23.9)
  BOTTOM w0.102: R11.2 28.93,9.13 27.75,10.31 R65.2 21.45,10.31 ; R24.1 v1(36.93,49.77) ; R14.2 v1(23.75,43.05) ; C45.2 v1(22.73,43.05)
  BOTTOM w0.127: 21.45,10.31 22.95,11.81 R10.2 22.95,16.14 25.34,18.53 v1(25.34,20.21) ; R39.2 v1(37.18,2.8) ; R34.2 v1(23.98,2.94)
  BOTTOM w0.254: C28.2 47.79,44.2 v1(48.39,44.2) ; v1(34.95,48.37) 35.04,48.37 35.5,47.92 C70.2 35.63,47 C69.2 35.62,46.99 v1(34.94,46.99) ; v1(35.68,30.85) 35.63,30.85 C77.2 C2.1 34.47,30.61 R74.2 ; v1(40.23,30.85) v1(40.88,30.85) 41.03,30.7 C13.2 40.88,30.38 v1(40.88,30.2) 41.03,30.05 C12.2 ; C1.2 37.39,32.04 v1(37.31,32.04) ; v1(38.38,44.17) 39.22,44.17 C68.2 ; 17.86,6.72 21.45,10.31 ; C71.2 40.39,46.21 v1(40.39,46.37) ; 13.34,13.72 14.81,13.72 15.81,14.72 16.45,14.72 17.06,15.33 17.06,17.31 16.63,17.74 FB1.1 ; R2.1 30.57,2.92 v1(30.57,2.91) R35.2
  BOTTOM w0.508: C72.2 v1(54.65,43.18) ; C72.2 v1(54.65,44.96) ; C72.2 53.61,44.07 v1(53.59,44.09) ; C82.1 5.33,35.21 v1(5.1,34.98) v1(6.99,34.98) C81.1 ; v1(16.23,31.05) 16.23,31.99 C83.1 16.22,32.89 v1(16.23,32.91) 15.93,33.22 C84.1
  BOTTOM w0.762: v1(9.4,24.97) v1(9.4,24.43) v1(9.4,23.9) 9.4,23.47 11.67,21.2 11.67,19.79 10.72,18.83 10.72,16.9 13.34,14.29 13.34,8.13 14.74,6.72 17.86,6.72 17.86,4.62 v1(19.53,2.94) v1(20.07,2.94)
  vias: v1(26.42,41.15) v1(27.3,41.15) v1(28.19,41.15) v1(29.08,41.02) v1(29.97,41.02)
